# Altium PCB NBP8 Xilinx Virtex-II Pro BGA456 Rev1.01.PcbDoc (part 1 of 4)
Units mm, origin at the board's own origin, x right, y up, seen from the top; angles counter-clockwise.
Board outline 69 x 99.5 mm, 8 copper layers (Top Layer, InternalPlane1, InternalPlane2, MidLayer1, MidLayer2, MidLayer3, MidLayer4, Bottom Layer), stack 1.545 mm thick; 164 components, 314 nets, 1132 pads, 807 vias.
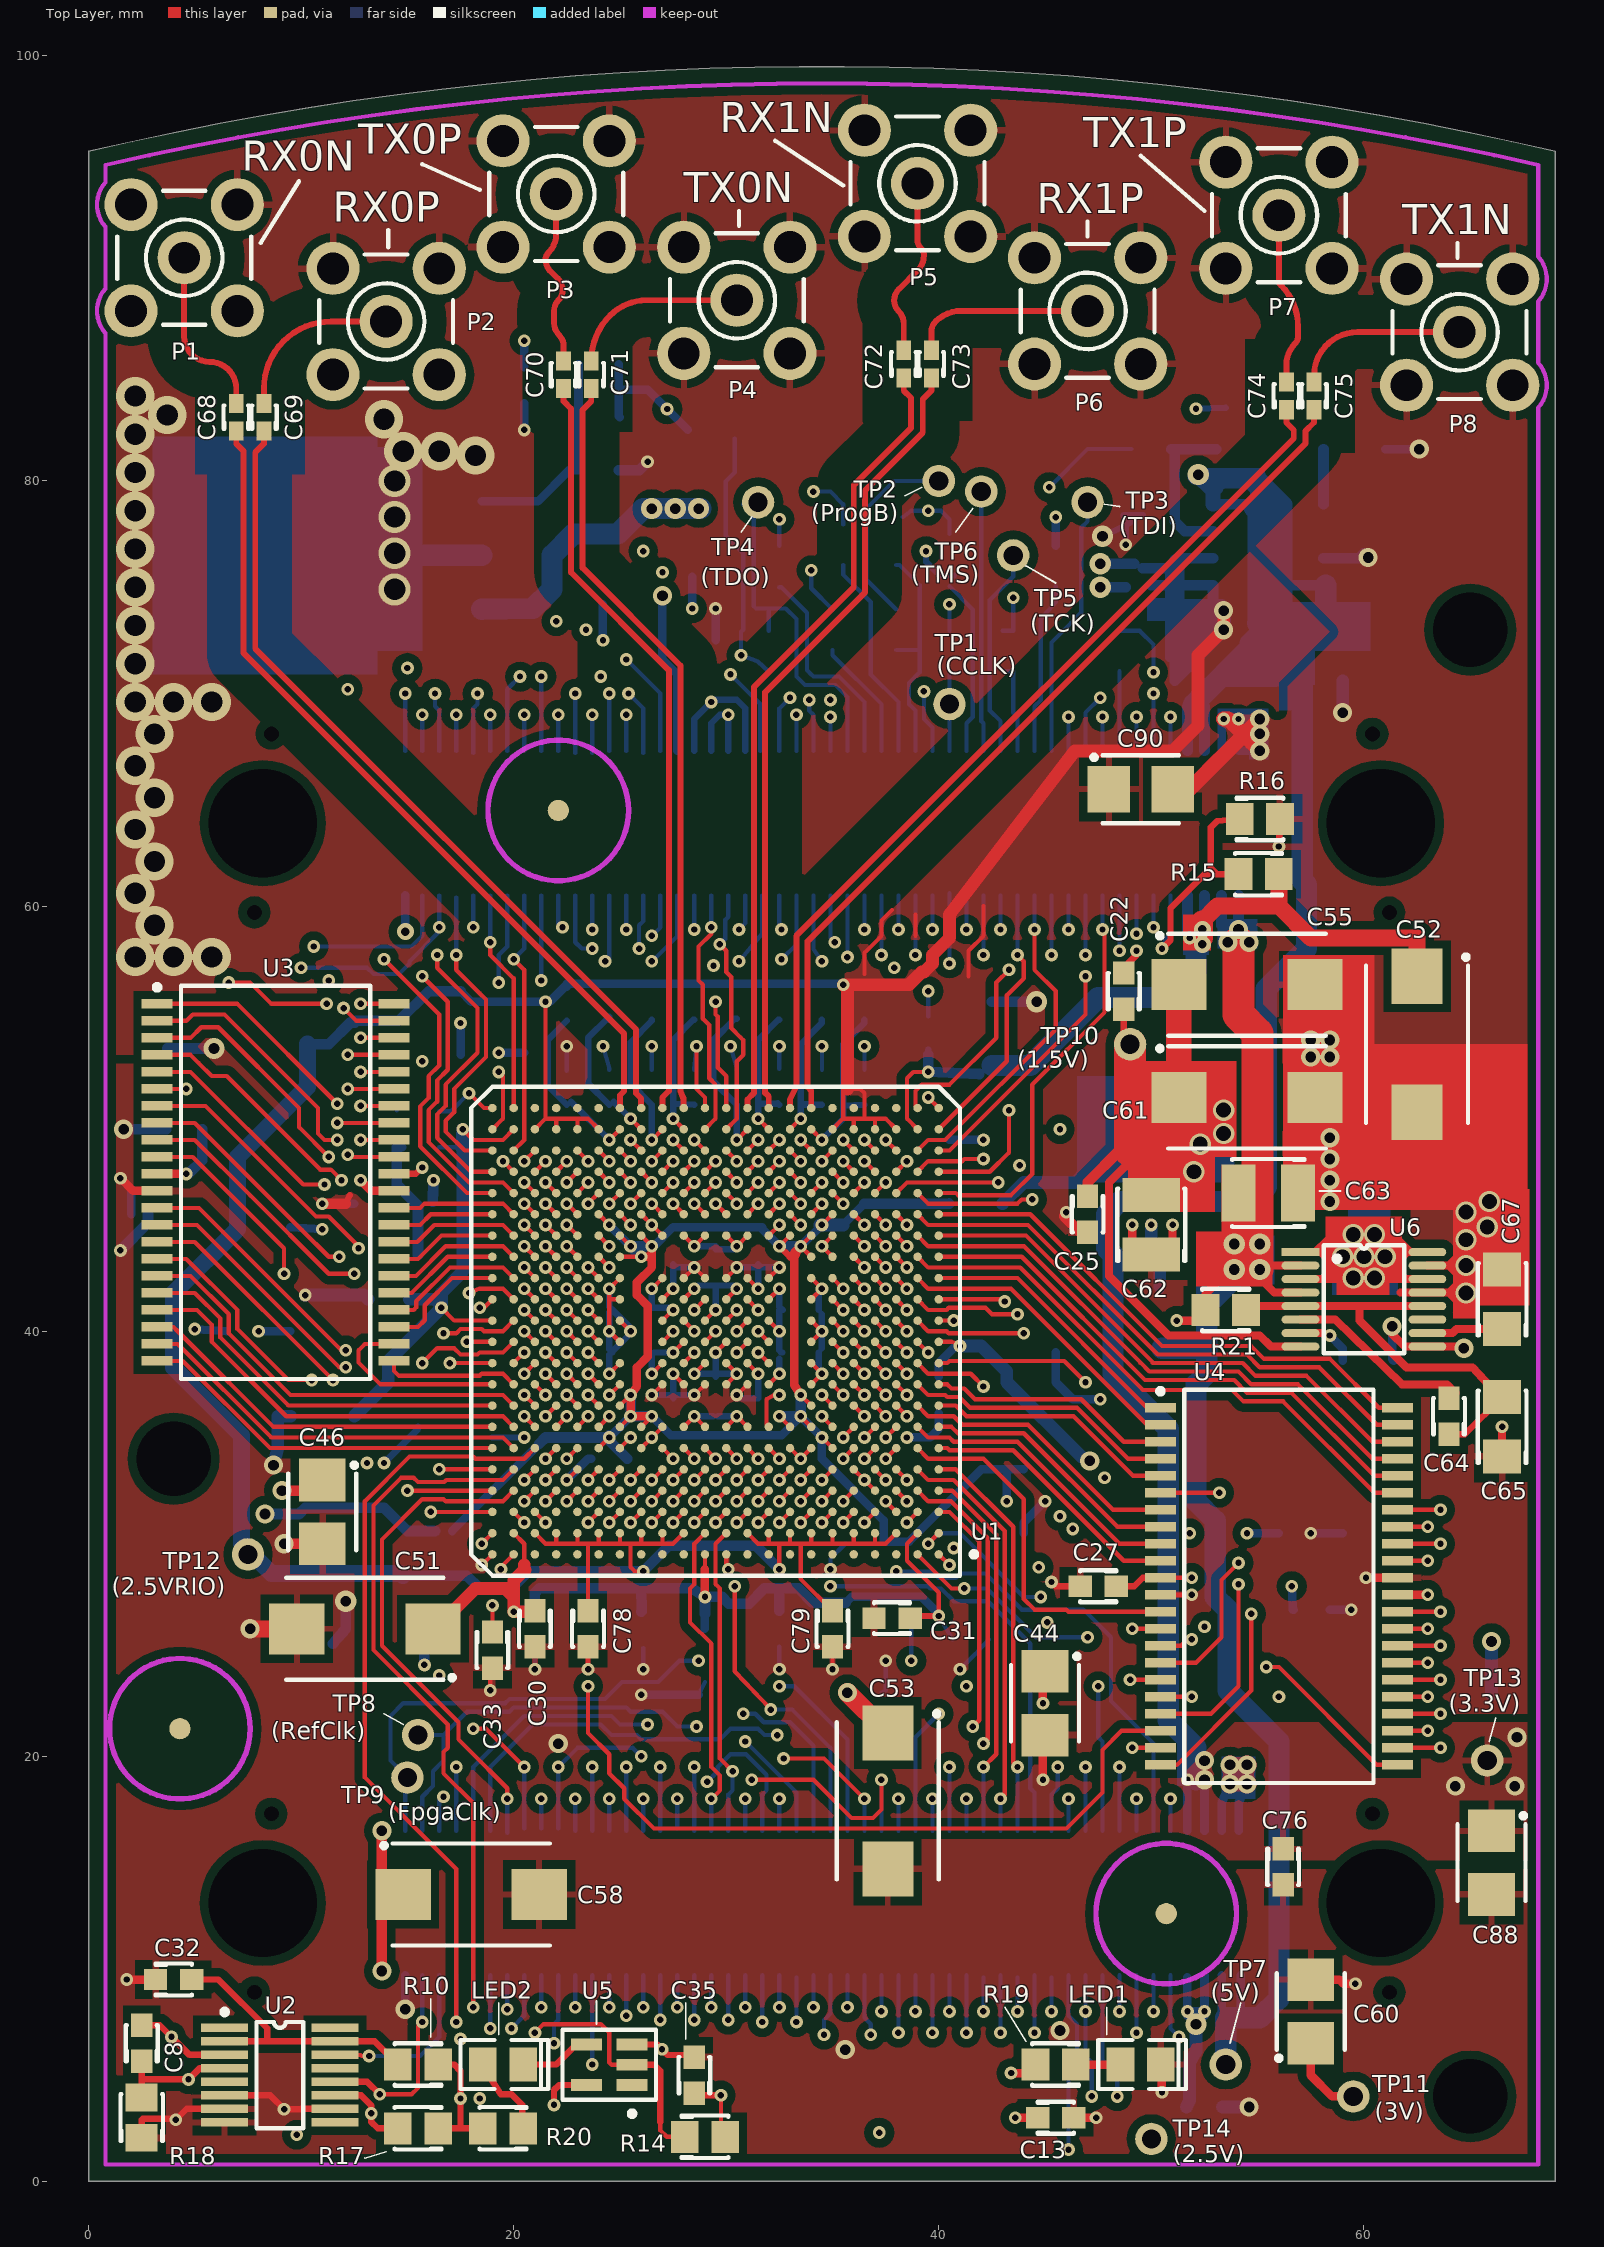
[diagram p0: Top Layer view]
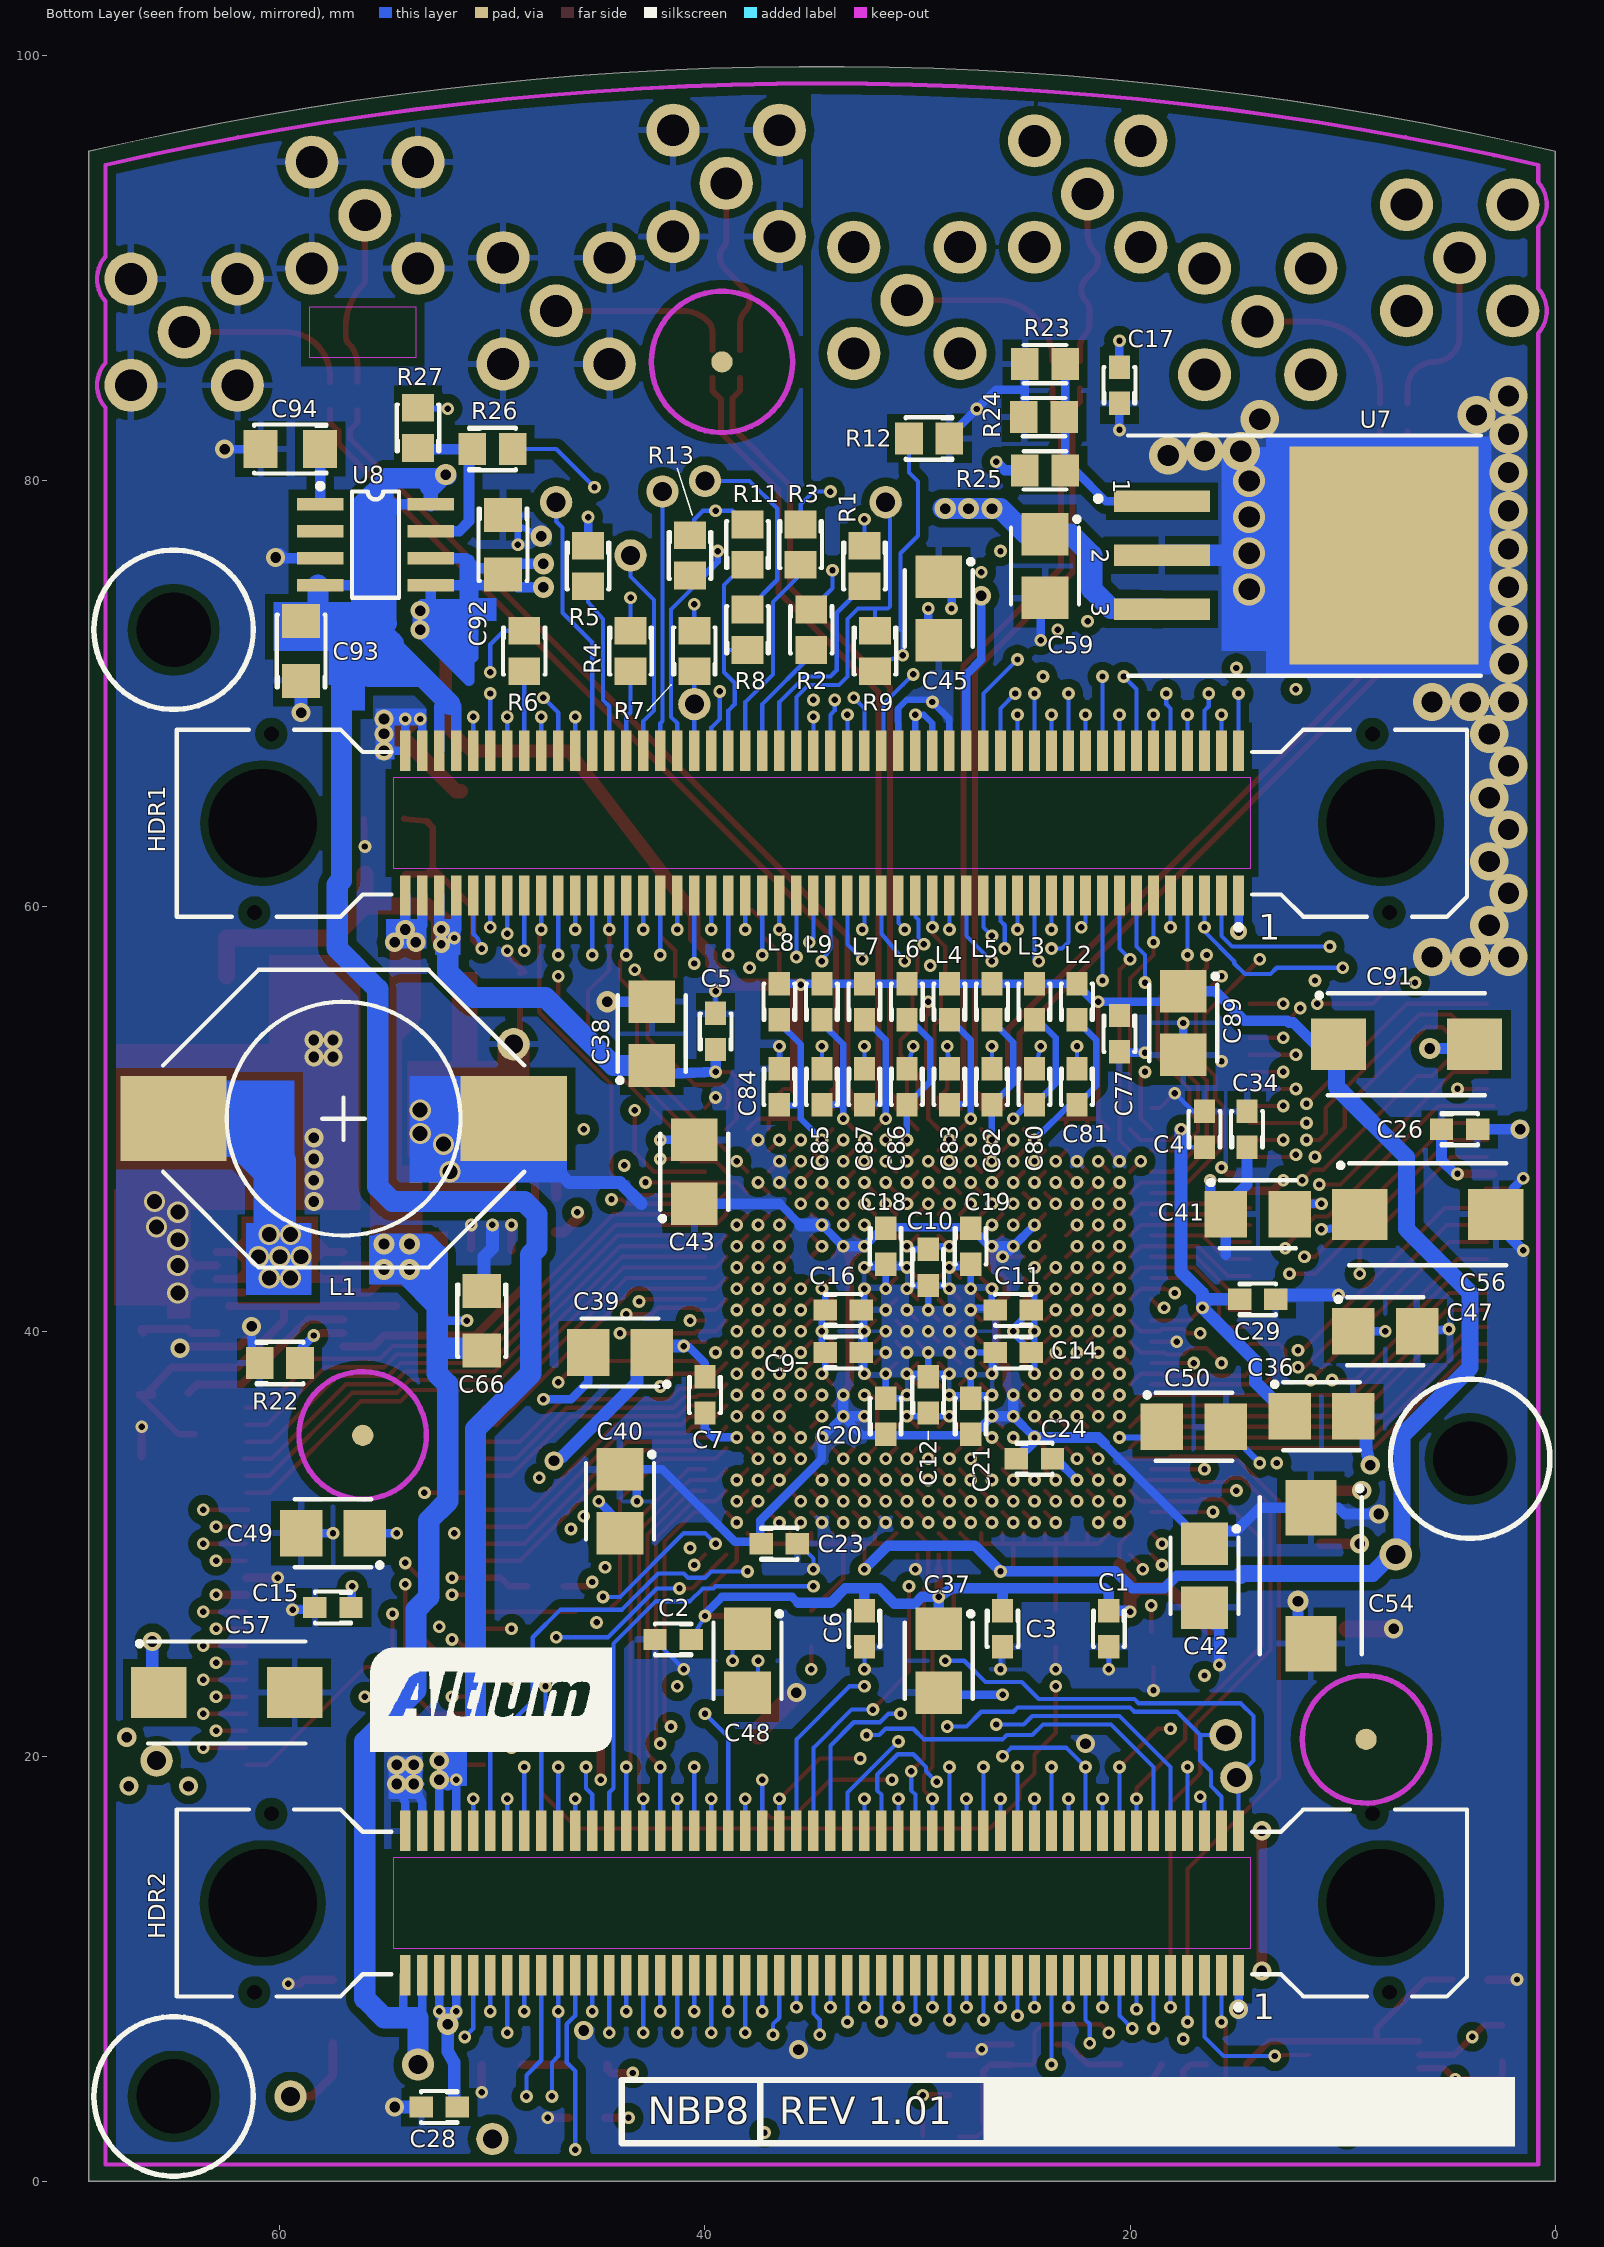
[diagram p1: Bottom Layer view, seen from below]
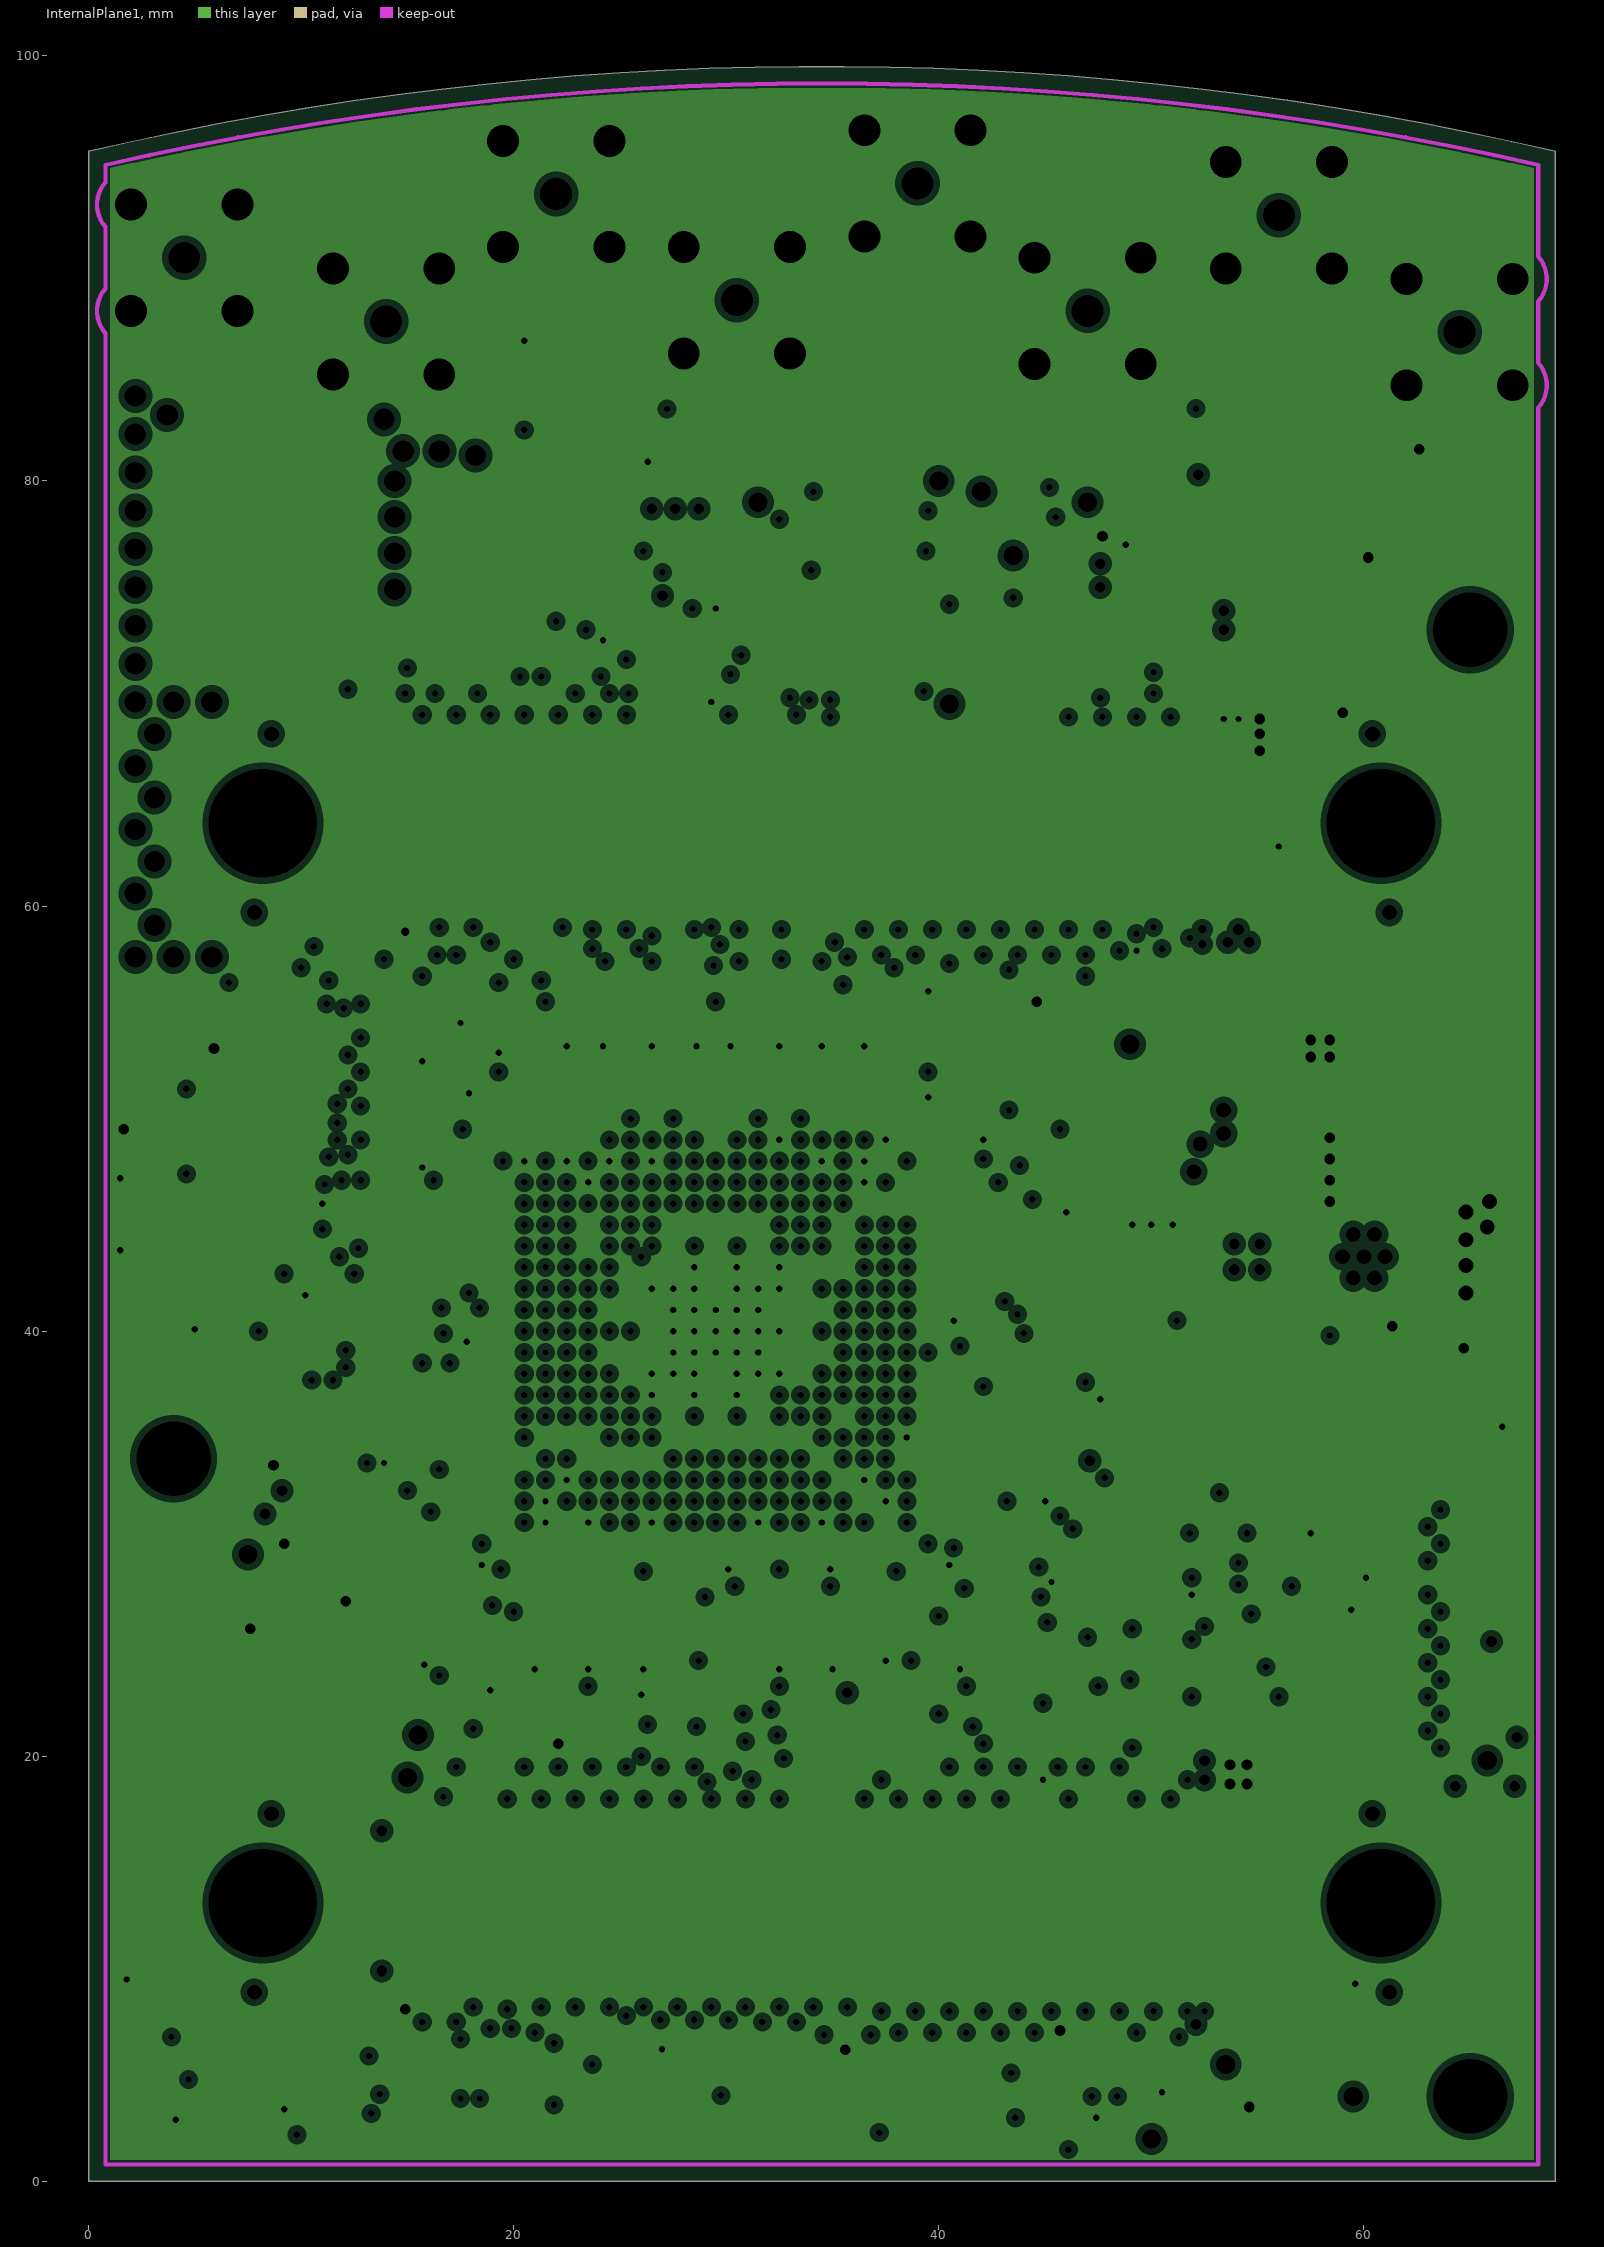
[diagram p2: InternalPlane1, clearances drawn from the general rule]
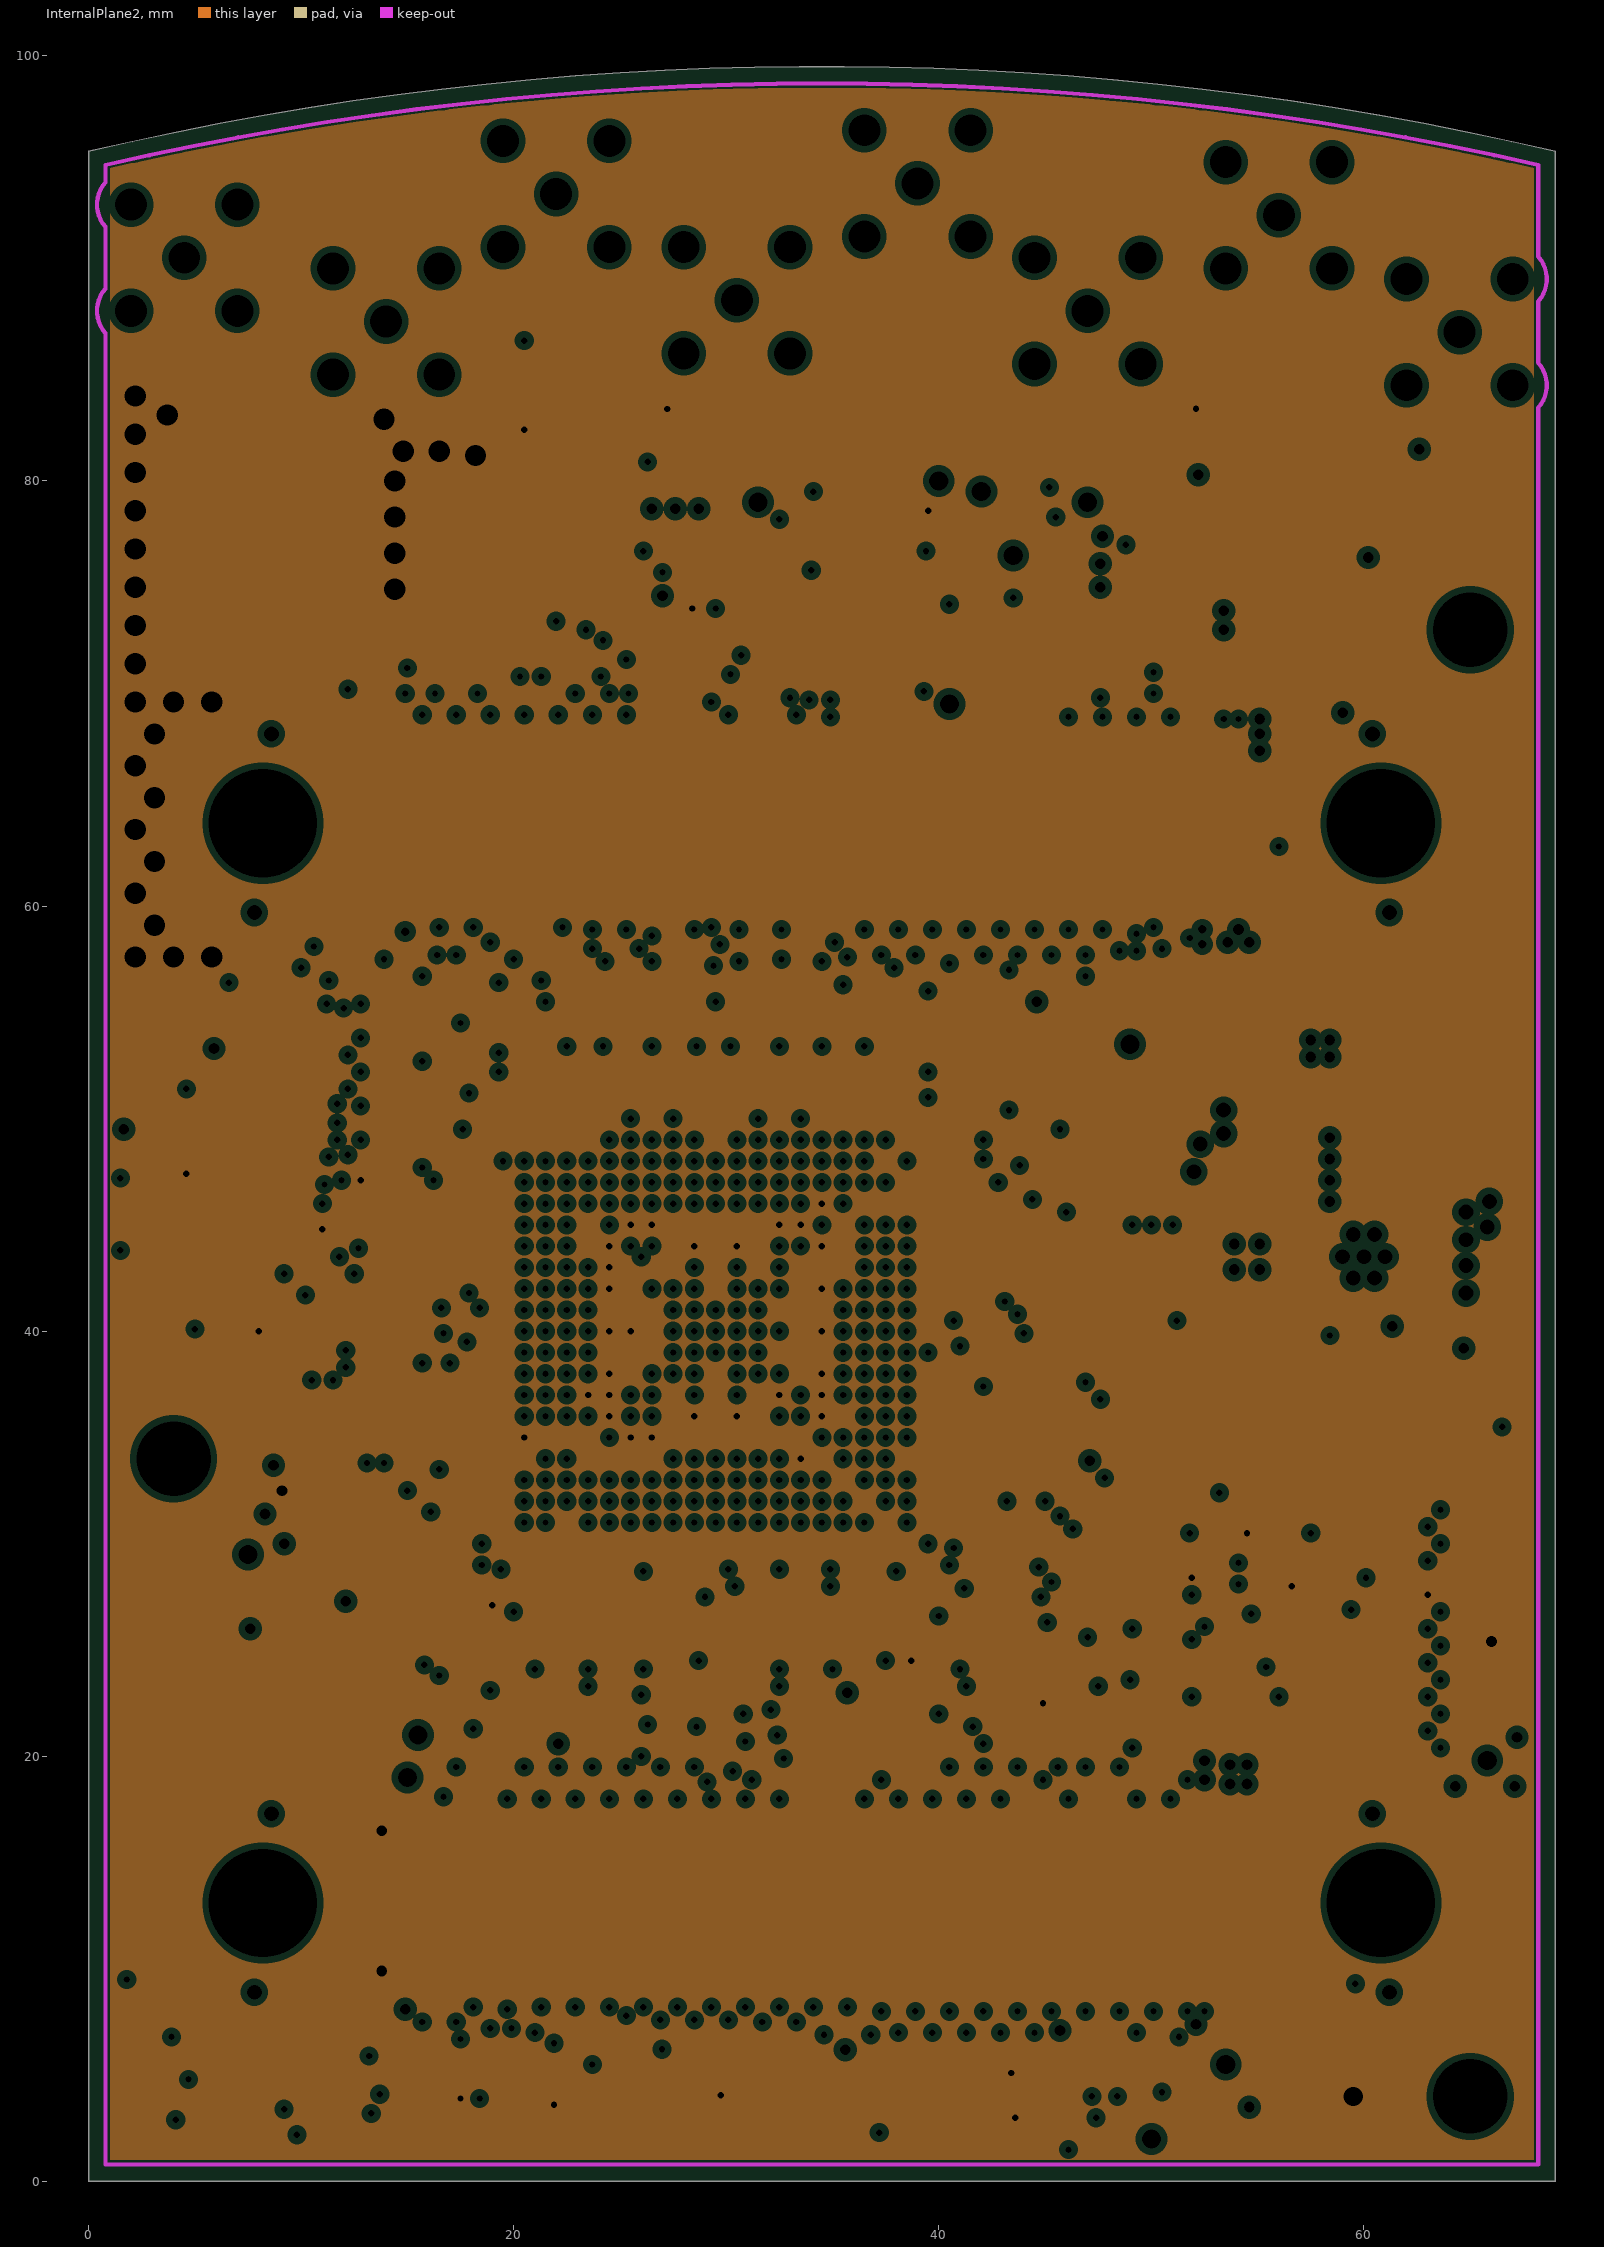
[diagram p3: InternalPlane2, clearances drawn from the general rule]
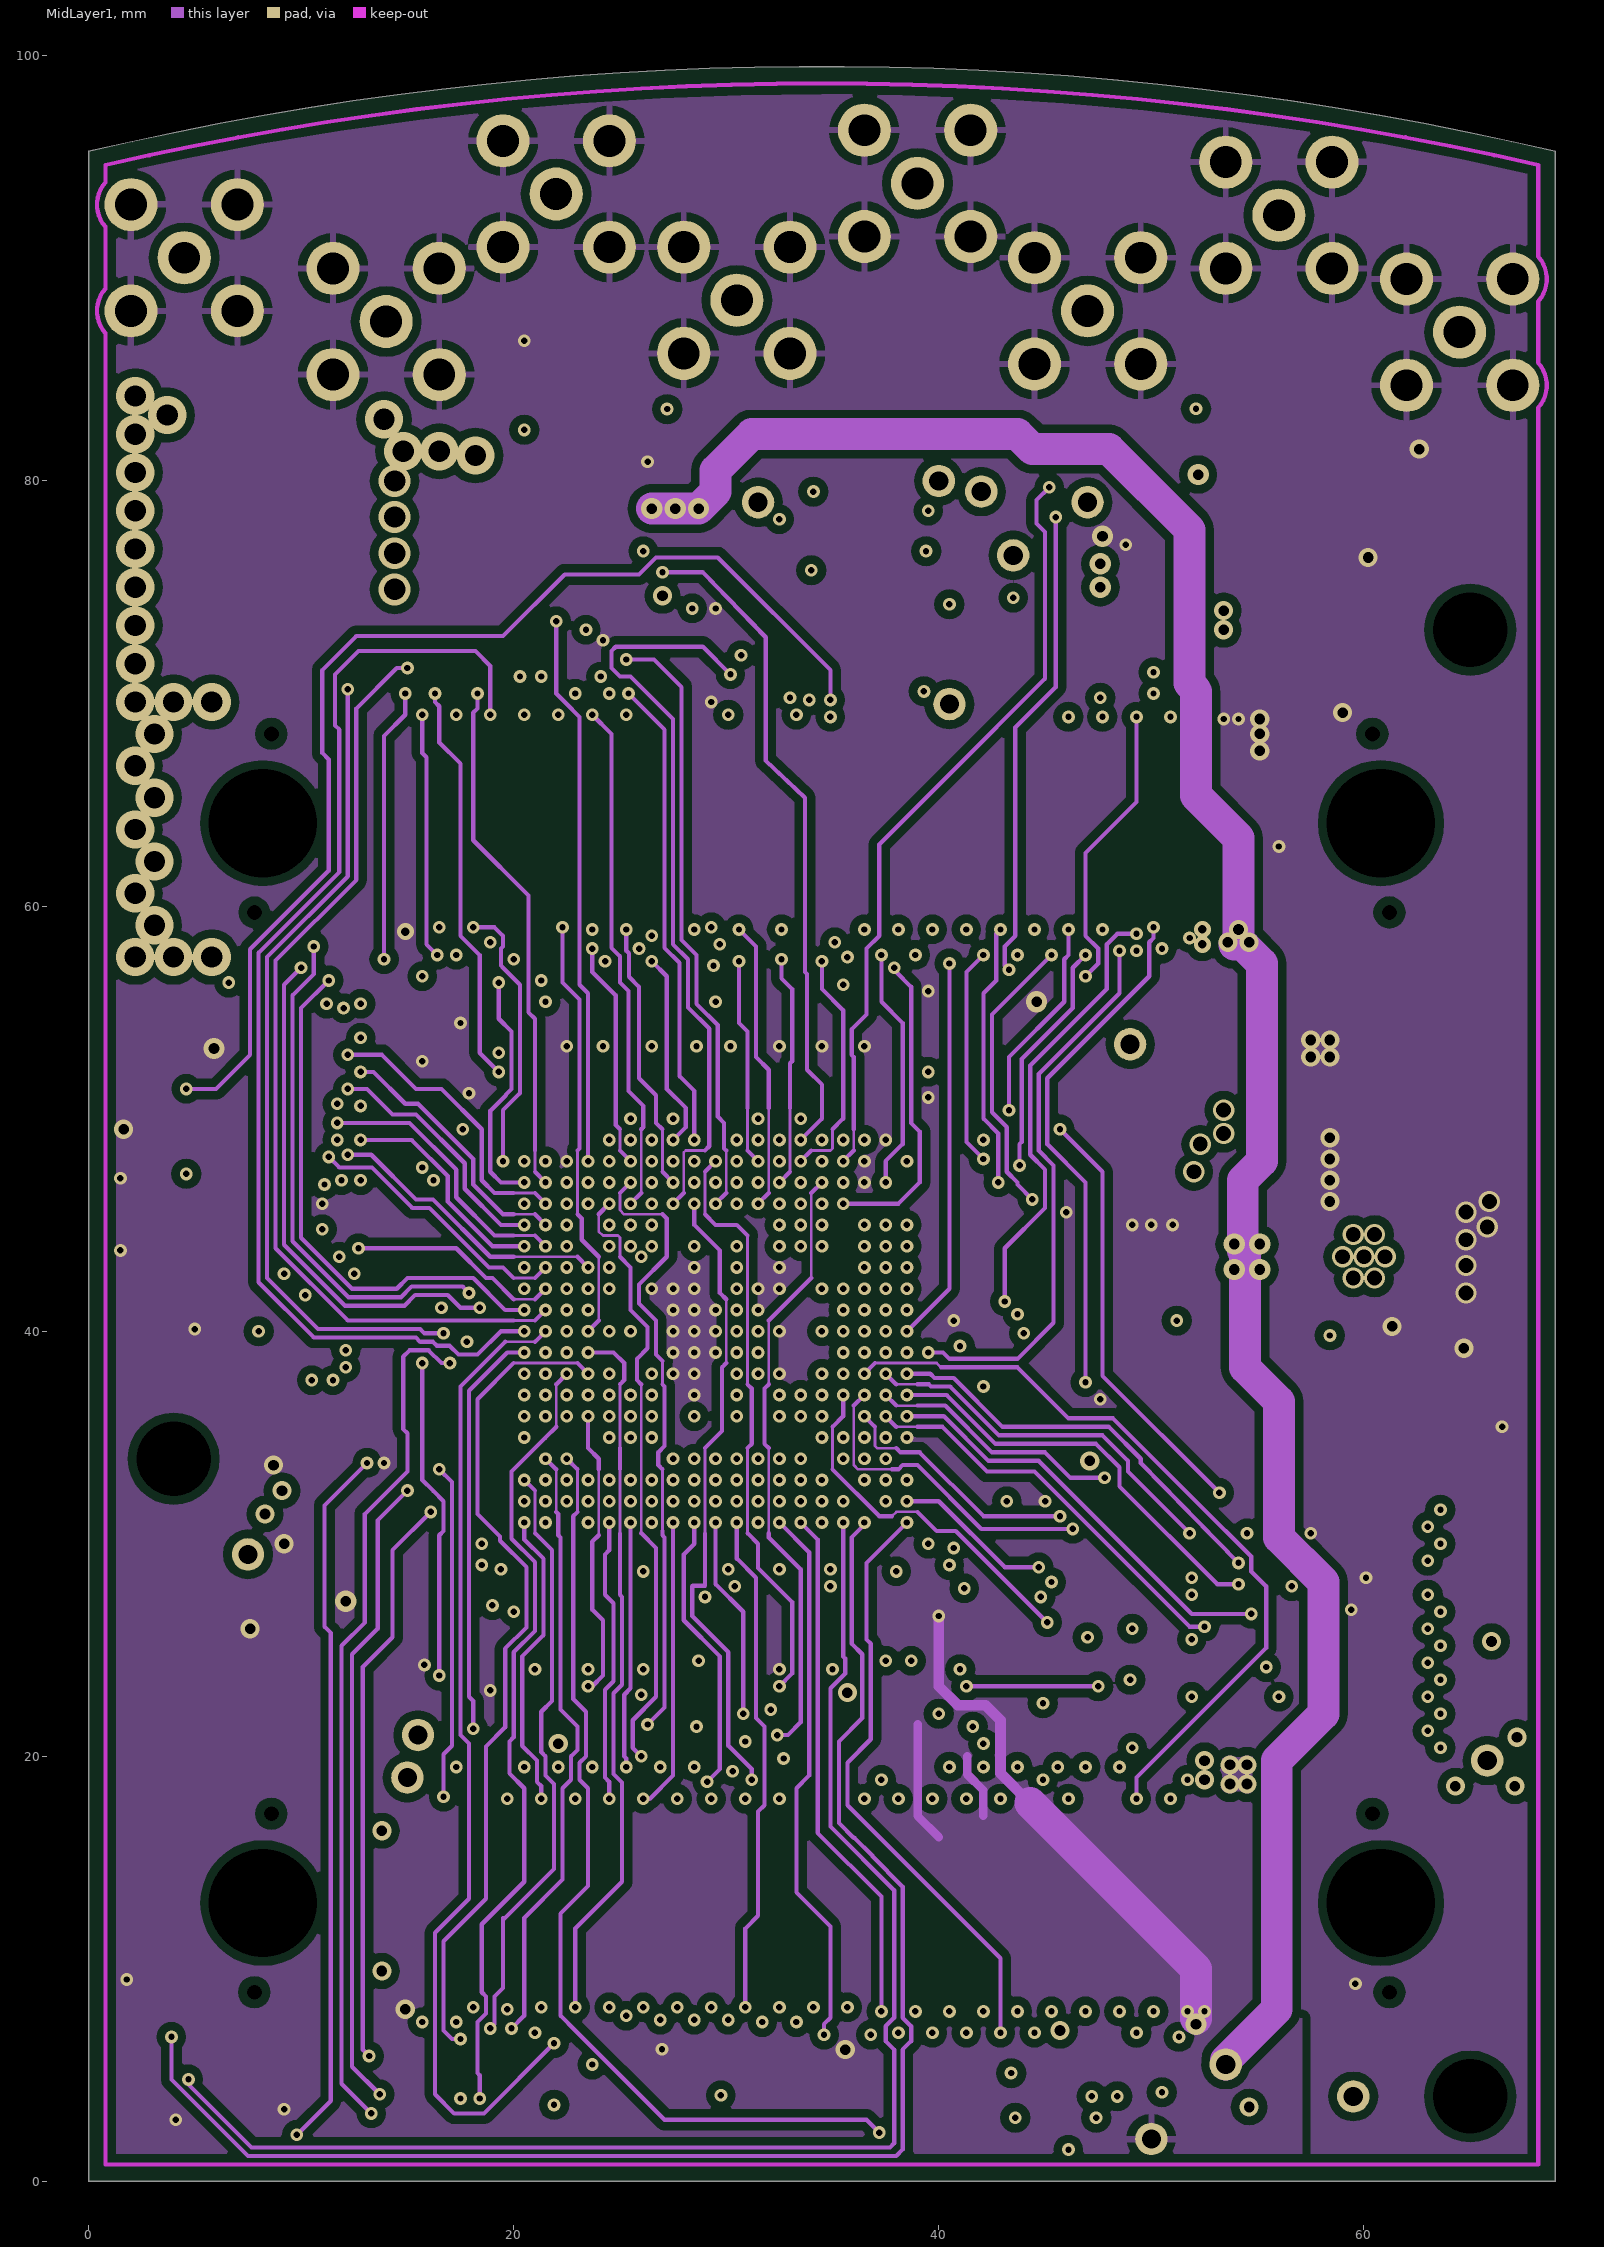
[diagram p4: MidLayer1]
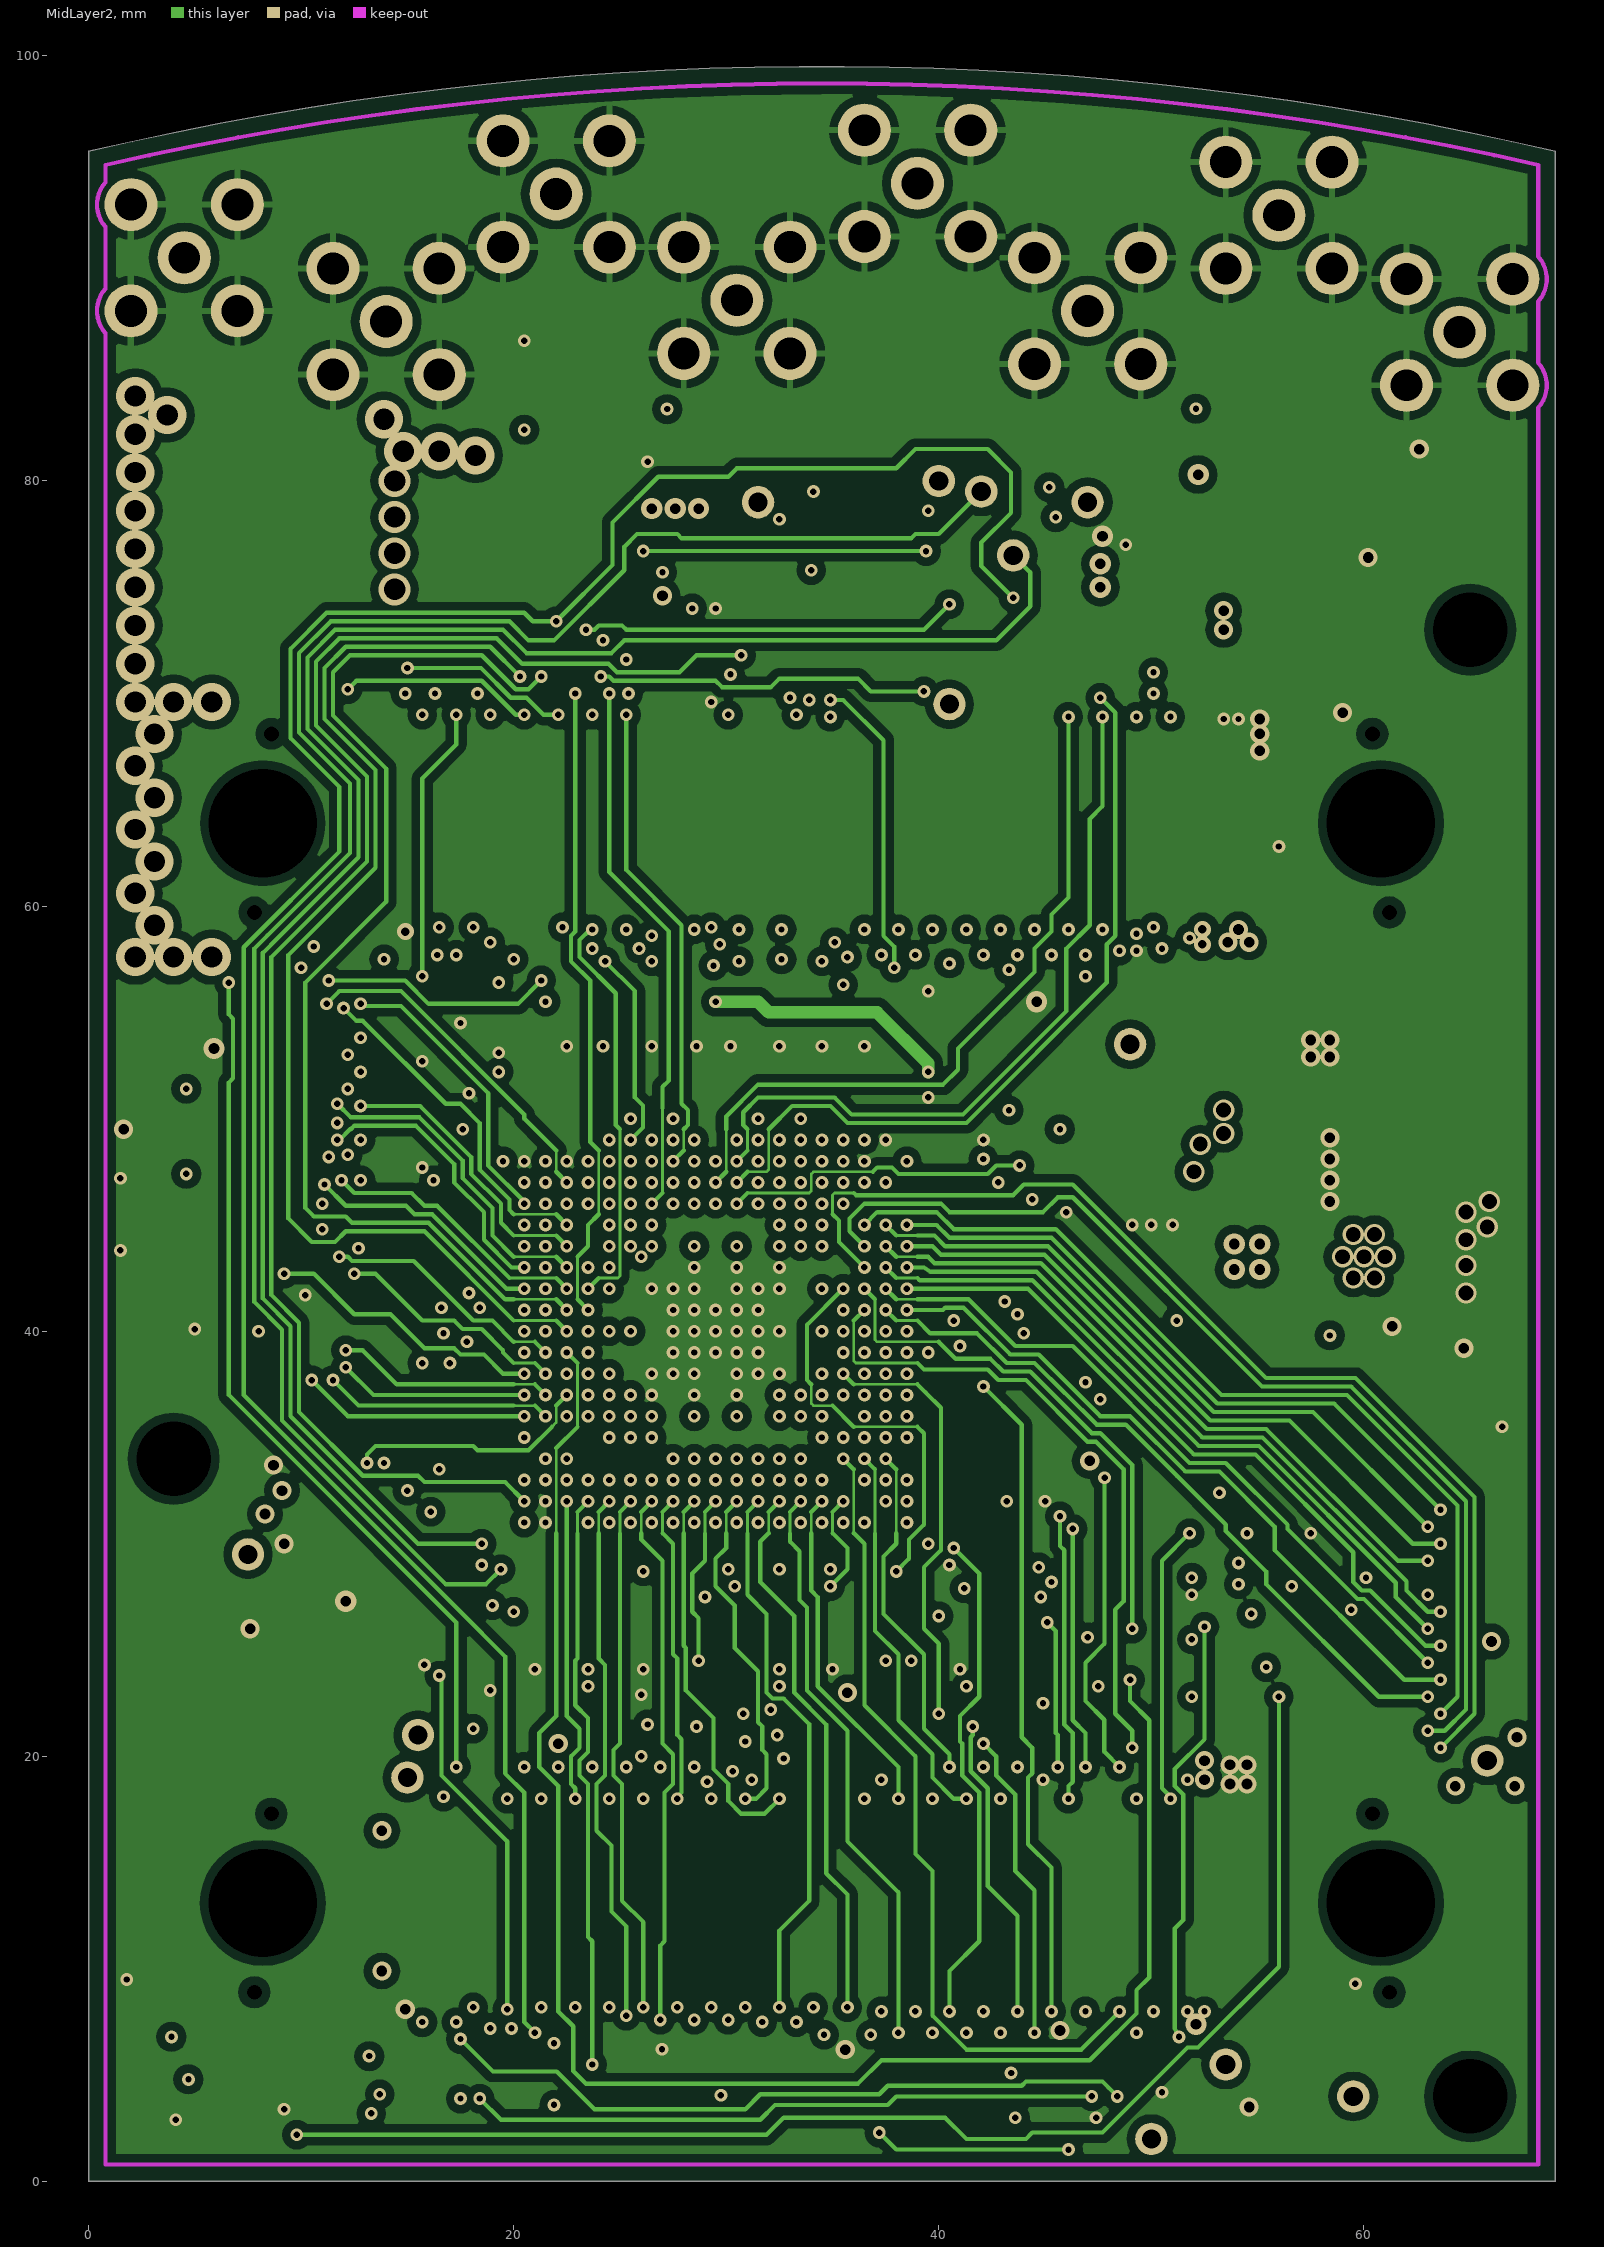
[diagram p5: MidLayer2]
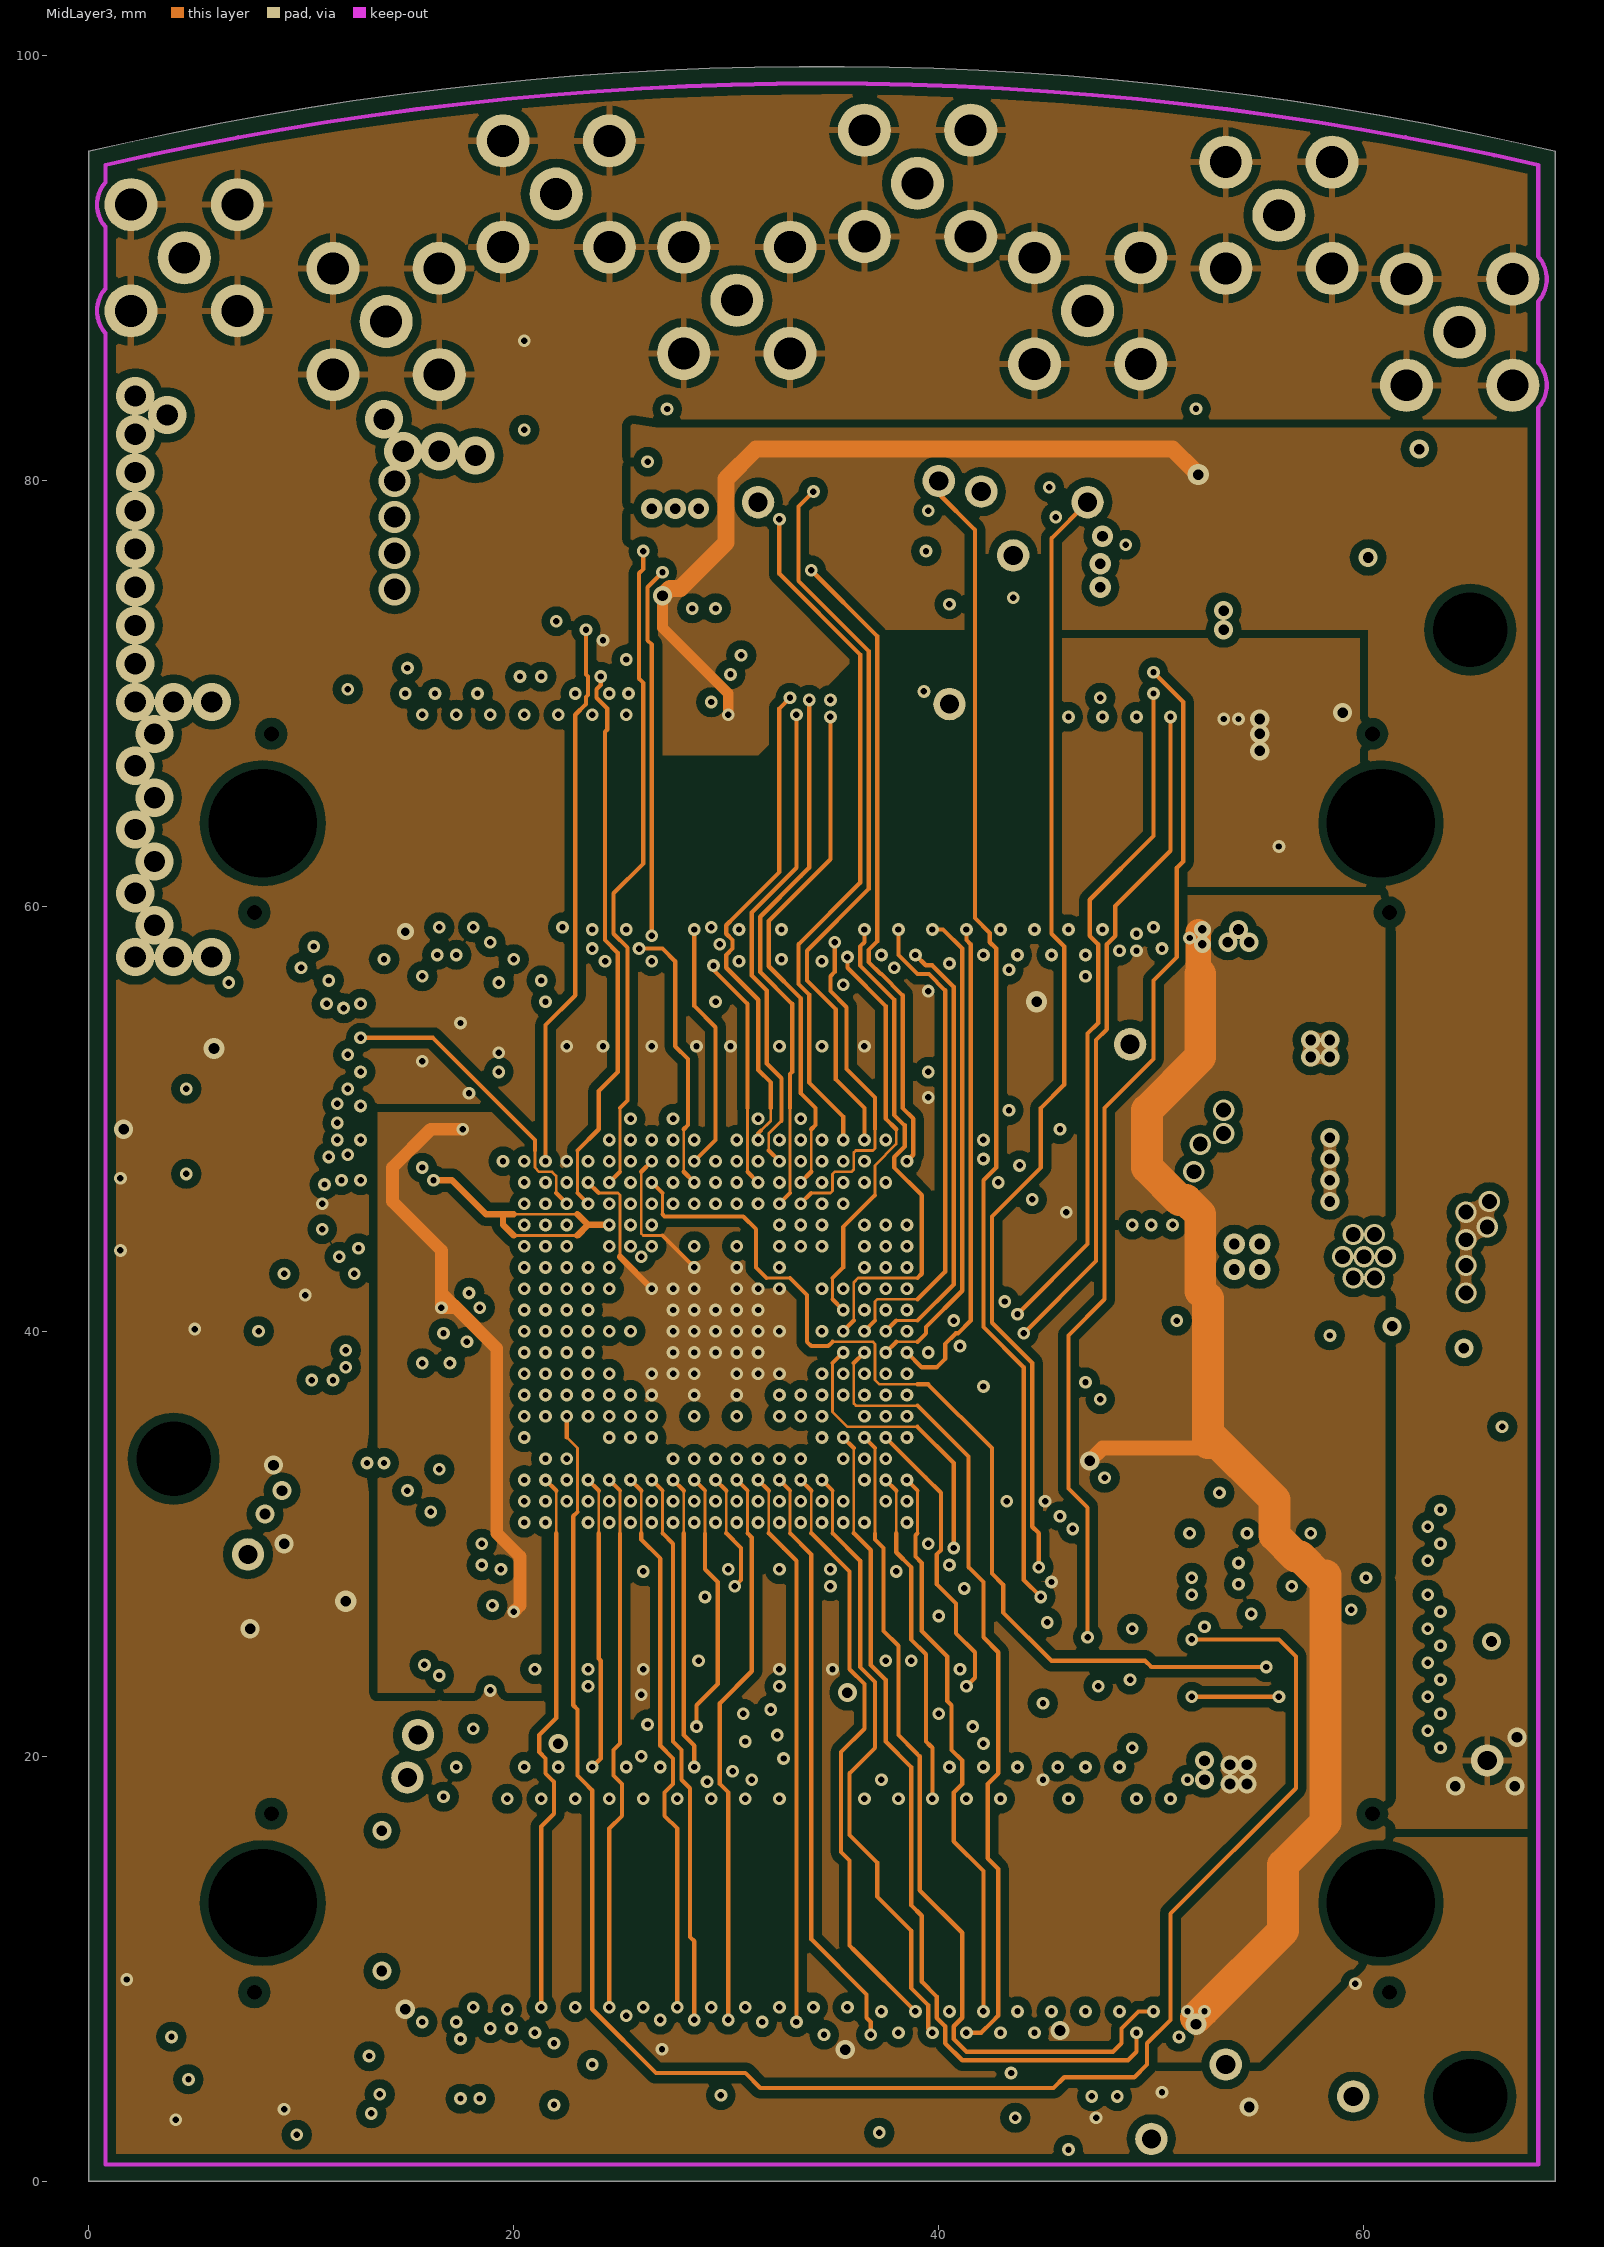
[diagram p6: MidLayer3]
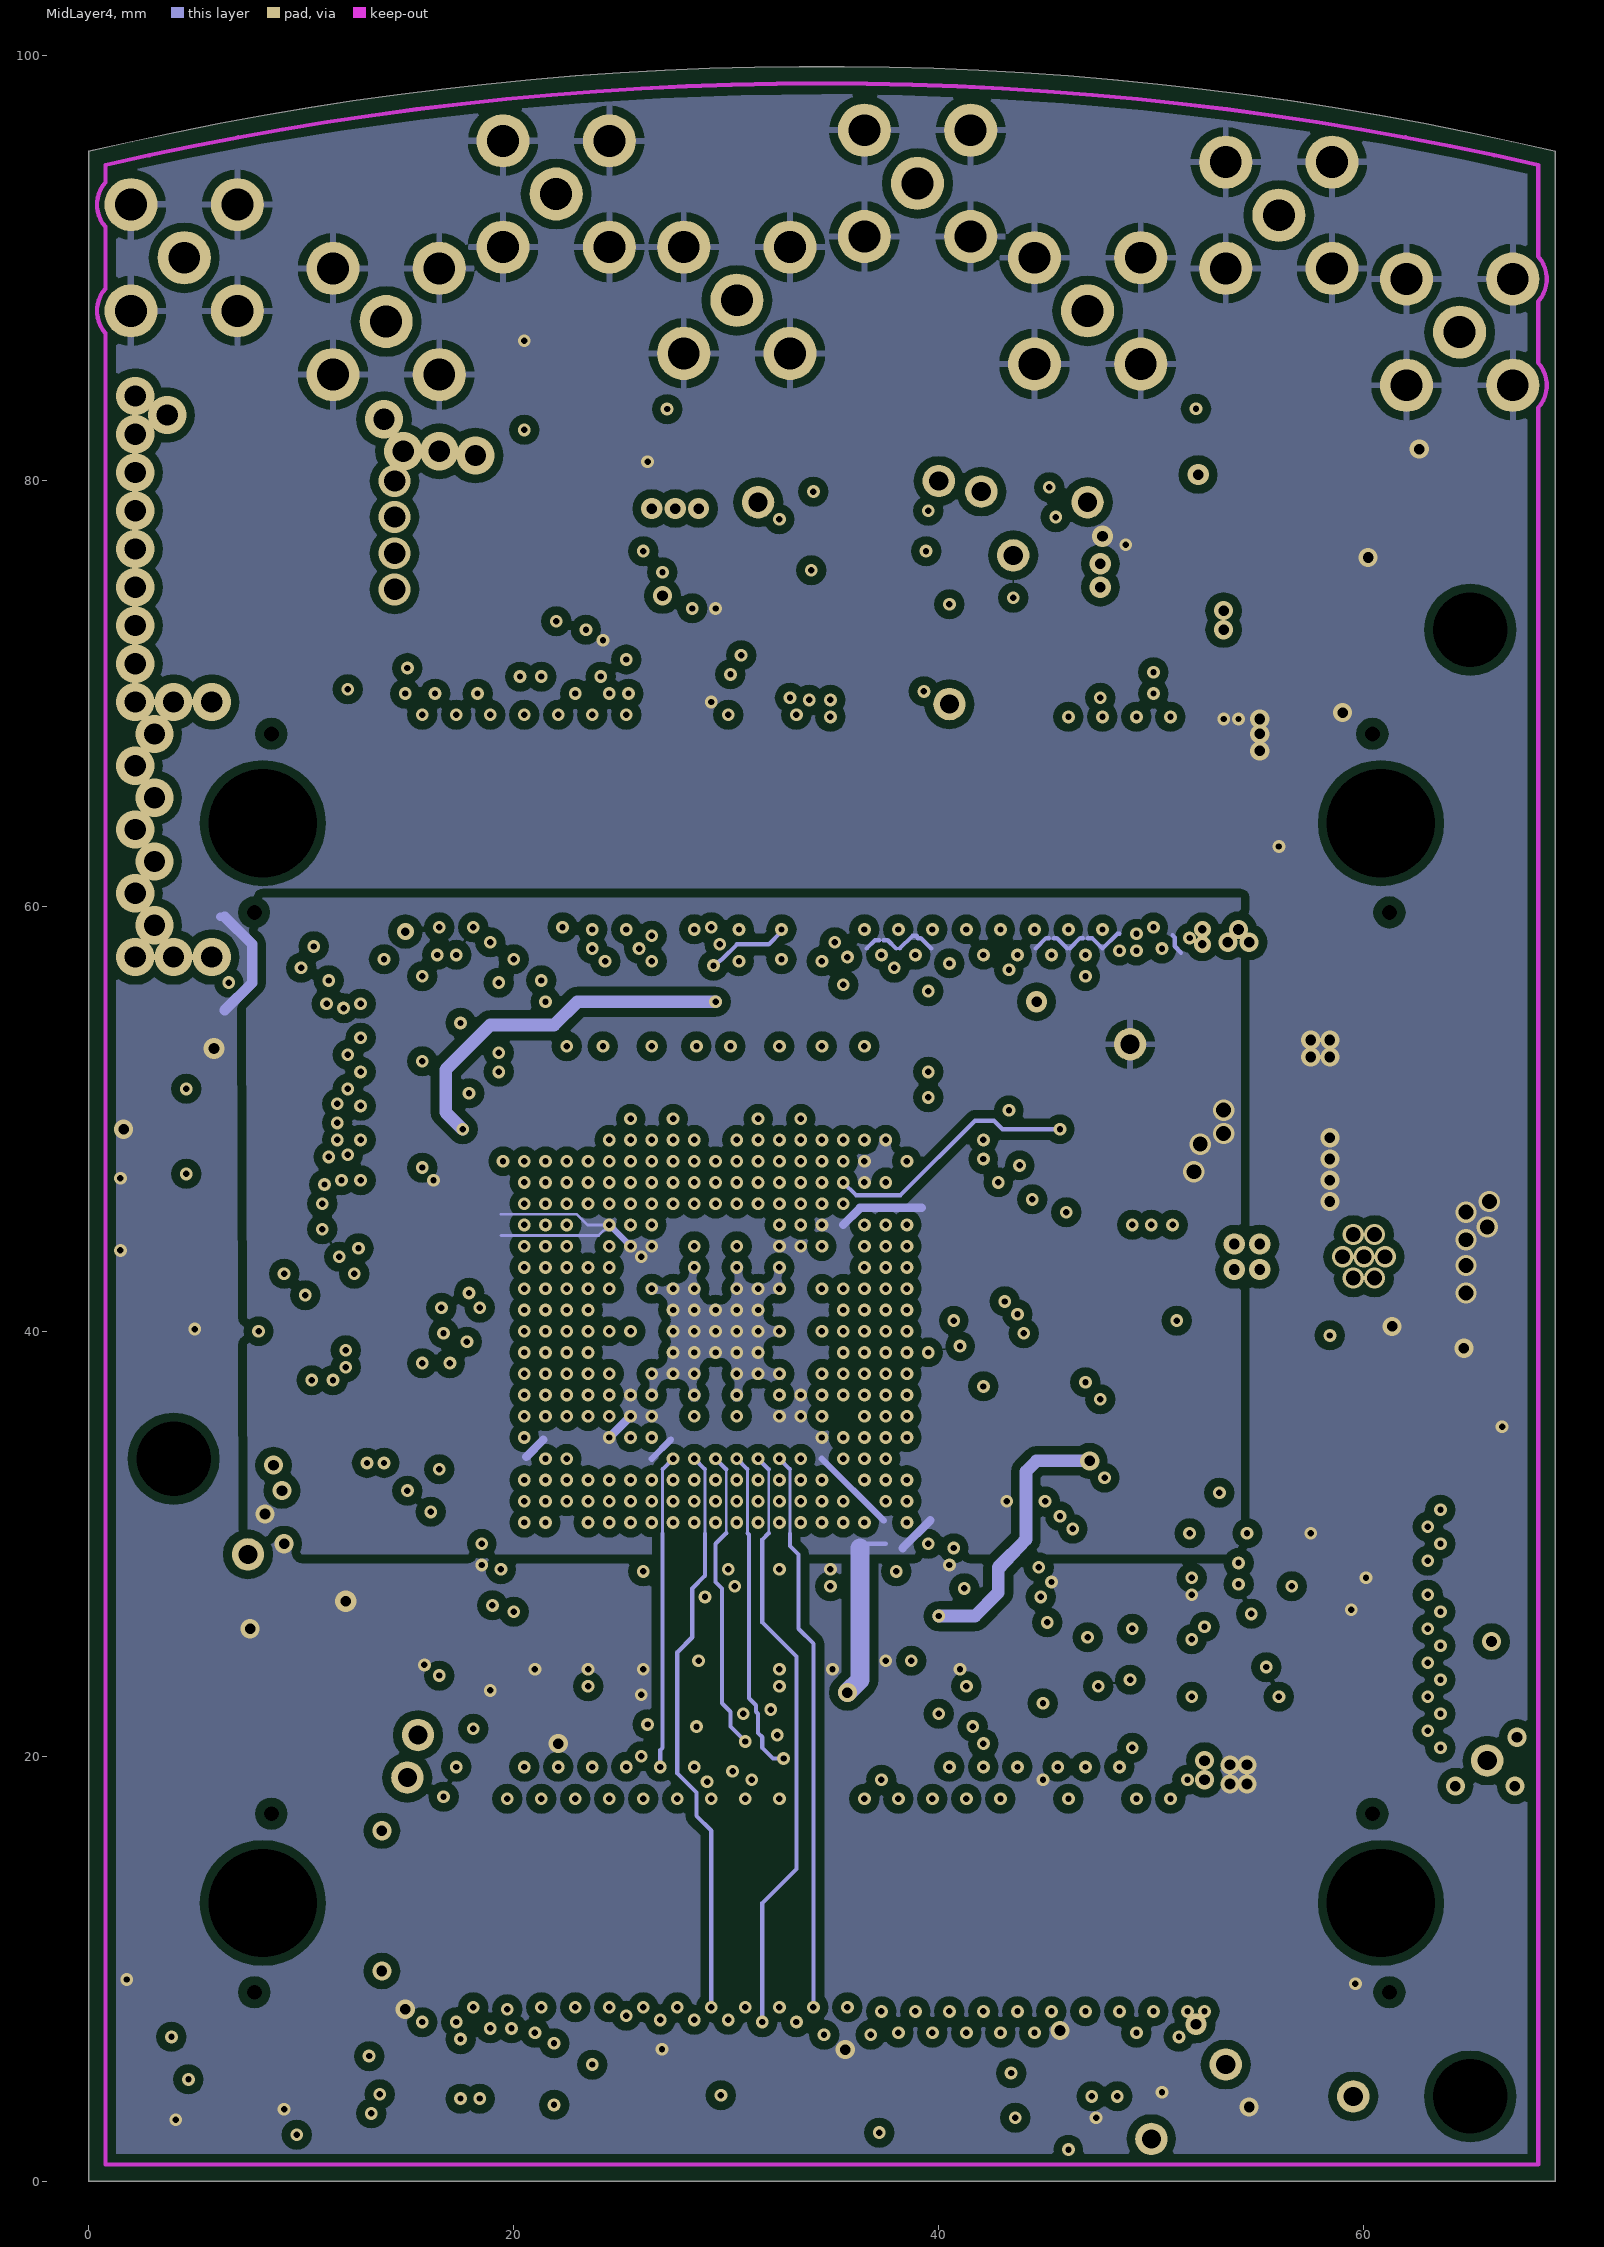
[diagram p7: MidLayer4]

## Layer stack, top to bottom
Top Layer: signal copper 0.018
Dielectric: core 0.2159, FR-4, Dk 4.5
InternalPlane1: plane copper 0.0356, net GND
Dielectric: prepreg 0.1524, FR-4, Dk 4.5
InternalPlane2: plane copper 0.0356, net VCC
Dielectric: core 0.2032, FR-4, Dk 4.5
MidLayer1: signal copper 0.0356
Dielectric: prepreg 0.1524, FR-4, Dk 4.5
MidLayer2: signal copper 0.0356
Dielectric: core 0.2032, FR-4, Dk 4.5
MidLayer3: signal copper 0.0356
Dielectric: prepreg 0.1524, FR-4, Dk 4.5
MidLayer4: signal copper 0.0356
Dielectric: core 0.2159, FR-4, Dk 4.5
Bottom Layer: signal copper 0.018

## Board outline
0,-0.001 cw(c0,0) -0.001,0 0,95.499 0,95.5 cw(c0.001,95.5) 0,95.501 cw(c34.5,-51.301) 69,95.501 cw(c68.999,95.5) 69,95.5 69,95.499 69.001,0 cw(c69,0) 69,-0.001

## Design rules (kind name [scope] priority, off if disabled: settings)
Clearance "Rocket I/O -> Top Layer Plane Clearance" [InNetClass('ROCKET_IO_LINES') vs OnLayer('Top Layer') And InPolygon] p1: gap=1.6
Clearance "Polygon Clearance" [InPoly] p2: gap=0.4
Clearance "TX1 Clearance" [InNetClass('TX1') vs InNetClass('TX1')] p3: gap=0.254
Clearance "RX1 Clearance" [InNetClass('RX1') vs InNetClass('RX1')] p4: gap=0.254
Clearance "RX0 Clearance" [InNetClass('RX0') vs InNetClass('RX0')] p5: gap=0.254
Clearance "TX0 Clearance" [InNetClass('TX0') vs InNetClass('TX0')] p6: gap=0.254
Clearance "Via --> Mid Layer Clearance" [IsVia vs OnMid] p7: gap=0.127
Clearance "Pad to Via Clearance" [IsPad vs IsVia] p8: gap=0.2
Clearance "General Clearance" [All] p9: gap=0.2
ComponentClearance ComponentClearance_General [Not InComponentClass('Rocket Decoupling Caps') vs Not InComponentClass('Rocket Decoupling Caps')] p1: gap=0.2 collisioncheckmode=3 verticalgap=0.254 showdistances=FALSE
ComponentClearance ComponentClearance_Default [All] p2 off: gap=0.2 collisioncheckmode=3 verticalgap=0.254 showdistances=FALSE
DiffPairsRouting [All] p1: maxlimit=0.254 minlimit=0.254 mostfreqgap=0.254 maxuncoupledlength=12.7
FabricationTestPointUsage TestPointUsage [All] p1 off: valid=0 allowmultiple=FALSE
FabricationTestpoint Testpoint [All] p1 off: side=3 testpointundercomponent=TRUE minsize=1.016 maxsize=2.54 preferedsize=1.524 minholesize=0 maxholesize=1.016 preferedholesize=0.813 testpointgrid=0.025 allowsidetop=TRUE allowsidebottom=TRUE usegrid=TRUE gridtolerance=0
FanoutControl Fanout_Small [CompPinCount < 5] p4: bgadir=Out bgaviamode=Centered fanoutstyle=Auto fanoutdirection=OutThenIn viagrid=0.025 // Fanout_Small (Default Rule)
HoleSize [All] p1: absolutevalues=TRUE maxlimit=10 minlimit=0.3 maxpercent=80.000 minpercent=20.000
MatchedLengths "V_RX0PN MatchedLengths" [InNet('V_RX0N') Or  InNet('V_RX0P')] p1 off: tolerance=0.1 checknetsindiffpair=TRUE checkdiffpairvsdiffpair=TRUE checkothers=TRUE
MatchedLengths "RX0PN MatchedLengths" [InNet('RX0P') Or InNet('RX0N')] p2 off: tolerance=0.1 checknetsindiffpair=TRUE checkdiffpairvsdiffpair=TRUE checkothers=TRUE
PlaneClearance [All] p1: clearance=0.3
PlaneConnect PlaneConnect_Vias [IsVia] p1: planeconnectstyle=Direct reliefexpansion=0.5 reliefentries=4 reliefconductorwidth=0.25 reliefairgap=0.25
PlaneConnect [All] p2: planeconnectstyle=Relief reliefexpansion=0.5 reliefentries=4 reliefconductorwidth=0.25 reliefairgap=0.25
PolygonConnect [All] p1: connectstyle=Relief reliefconductorwidth=0.3 reliefentries=4 polygonreliefangle="90 Angle"
RoutingLayers [All] p1: top layer_v5=TRUE mid layer 1_v5=TRUE mid layer 2_v5=TRUE mid layer 3_v5=FALSE mid layer 4_v5=FALSE bottom layer_v5=TRUE
RoutingVias [All] p1: holewidth=0.3 width=0.6 viastyle="Through Hole" minholewidth=0.3 minwidth=0.5 maxholewidth=0.5 maxwidth=1
SMDNeckDown [All] p1: percent=100.000
SilkscreenOverComponentPads [All] p1: minsilkscreentomaskgap=0.254
SolderMaskExpansion [All] p1: expansion=0.15
Width "Rocket IO Width" [InNetClass('ROCKET_IO_LINES')] p1: maxlimit=0.279 minlimit=0.279 preferedwidth=0.279
Width [All] p2: maxlimit=5 minlimit=0.127 preferedwidth=0.2 toplayer_minwidth=0.2 midlayer4_prefwidth=0.127 bottomlayer_minwidth=0.2
18 further rules are at their usual default settings.

## Classes and differential pairs
component class "NBP8 Xilinx Virtex-II Pro BGA456 Rev1.01": C1 C2 C3 C4 C5 C6 C7 C8 C9 C10 C11 C12 C13 C14 C15 C16 C17 C18 C19 C20 C21 C22 C23 C24 C25 C26 C27 C28 C29 C30 C31 C32 C33 C34 C35 C36 C37 C38 C39 C40 C41 C42 C43 C44 C45 C46 C47 C48 C49 C50 C51 C52 C53 C54 C55 C56 C57 C58 HDR1 HDR2 LED1 LED2 R1 R2 R3 R4 R5 R6 R7 R8 R9 R10 R11 R12 R13 R14 R15 R16 R17 R18 R19 R20 TP1 TP2 TP3 TP4 TP5 TP6 TP7 TP8 TP9 TP10 TP11 TP13 TP14 U1 U2 U3 U4 U5
component class "Rocket Decoupling Caps": C68 C69 C70 C71 C72 C73 C74 C75
component class "Bottom Side": C1 C2 C3 C4 C5 C6 C7 C9 C10 C11 C12 C14 C15 C16 C17 C18 C19 C20 C21 C23 C24 C26 C28 C29 C34 C36 C37 C38 C39 C40 C41 C42 C43 C45 C47 C48 C49 C50 C54 C56 C57 C59 C66 C77 C80 C81 C82 C83 C84 C85 C86 C87 C89 C91 C92 C93 C94 HDR1 HDR2 L1 L2 L3 L4 L5 L6 L7 L8 L9 R1 R2 R3 R4 R5 R6 R7 R8 R9 R11 R12 R13 R22 R23 R24 R25 R26 R27 U7 U8
component class "Top Side": C8 C13 C22 C25 C27 C30 C31 C32 C33 C35 C44 C46 C51 C52 C53 C55 C58 C60 C61 C62 C63 C64 C65 C67 C68 C69 C70 C71 C72 C73 C74 C75 C76 C78 C79 C88 C90 LED1 LED2 P1 P2 P3 P4 P5 P6 P7 P8 R10 R14 R15 R16 R17 R18 R19 R20 R21 TP1 TP2 TP3 TP4 TP5 TP6 TP7 TP8 TP9 TP10 TP11 TP12 TP13 TP14 U1 U2 U3 U4 U5 U6
component class RIO_CONNECTORS: P1 P2 P3 P4 P5 P6 P7 P8
net class ROCKET_IO_LINES: RX0N RX0P RX1N RX1P TX0N TX0P TX1N TX1P V_RX0N V_RX0P V_RX1N V_RX1P V_TX0N V_TX0P V_TX1N V_TX1P
net class RX1: RX1N RX1P V_RX1N V_RX1P
net class TX1: TX1N TX1P V_TX1N V_TX1P
net class RX0: RX0N RX0P V_RX0N V_RX0P
net class TX0: TX0N TX0P V_TX0N V_TX0P
component class "PSU 1": C59 C60 C61 C62 C63 C64 C65 C66 C67 L1 R21 R22 R23 R24 R25 U6 U7
pad class 500andUp: U1-A8 U1-A9 U1-A14 U1-A15 U1-AA8 U1-AA9 U1-AA14 U1-AA15 U1-AB8 U1-AB9 U1-AB14 U1-B8 U1-B9 U1-B14 U1-B15 U1-C9 U1-C14 U1-C15 U1-D9 U1-D14 U1-D15 U1-E9 U1-F9 U1-J1 U1-J2 U1-J3 U1-J4 U1-J5 U1-J19 U1-J20 U1-J21 U1-J22 U1-K5 U1-K6 U1-K17 U1-K18 U1-K19 U1-K20 U1-L6 U1-N3 U1-N4 U1-N5 U1-N6 U1-N18 U1-N19 U1-N20 U1-P1 U1-P2 U1-P3 U1-P4 U1-P18 U1-P19 U1-P20 U1-P21 U1-P22 U1-U14 U1-V14 U1-W8 U1-W9 U1-W14 U1-Y8 U1-Y9 U1-Y14
pad class IN_ONLY: U1-A11 U1-AA11 U1-AA12 U1-C11 U1-D11 U1-D12 U1-F12 U1-F13 U1-W11 U1-W12 U1-Y11 U1-Y12
pad class IO: U1-A4 U1-A5 U1-A6 U1-A10 U1-A13 U1-A17 U1-A18 U1-A19 U1-AA5 U1-AA10 U1-AA13 U1-AA17 U1-AA18 U1-AA20 U1-AB5 U1-AB13 U1-AB16 U1-AB17 U1-AB18 U1-B4 U1-B5 U1-B6 U1-B10 U1-B12 U1-B13 U1-B17 U1-B18 U1-B19 U1-C1 U1-C2 U1-C4 U1-C6 U1-C10 U1-C12 U1-C13 U1-C18 U1-C21 U1-D1 U1-D2 U1-D6 U1-D10 U1-D13 U1-D17 U1-D18 U1-D21 U1-E1 U1-E2 U1-E3 U1-E4 U1-E5 U1-E6 U1-E7 U1-E8 U1-E10 U1-E11 U1-E13 U1-E14 U1-E16 U1-E17 U1-E18 U1-E19 U1-E20 U1-E21 U1-E22 U1-F10 U1-F11 U1-F18 U1-G1 U1-G2 U1-G21 U1-G22 U1-H1 U1-H2 U1-H3 U1-H4 U1-H5 U1-H19 U1-H20 U1-H21 U1-H22 U1-J6 U1-J17 U1-J18 U1-K1 U1-K2 U1-K3 U1-K4 U1-K21 U1-K22 U1-L2 U1-L3 U1-L4 U1-L5 U1-L17 U1-L18 U1-L19 U1-L20 U1-L21 U1-L22 U1-M1 U1-M2 U1-M3 U1-M4 U1-M5 U1-M6 U1-M17 U1-M18 U1-M19 U1-M20 U1-M21 U1-N1 U1-N2 U1-N17 U1-N21 U1-P5 U1-P6 U1-P17 U1-R1 U1-R2 U1-R3 U1-R4 U1-R18 U1-R19 U1-R20 U1-R21 U1-R22 U1-T1 U1-T2 U1-T21 U1-T22 U1-U3 U1-U4 U1-U10 U1-U11 U1-U12 U1-U13 U1-V3 U1-V4 U1-V5 U1-V6 U1-V7 U1-V9 U1-V10 U1-V12 U1-V13 U1-V19 U1-V20 U1-V21 U1-V22 U1-W1 U1-W2 U1-W6 U1-W10 U1-W13 U1-W17 U1-W21 U1-W22
pad class IO_CLK: U1-AB12 U1-B11 U1-E12 U1-V11
pad class PAR_DATA: U1-AA3 U1-AA4 U1-AB4 U1-AB19 U1-V17 U1-Y4 U1-Y5 U1-Y16 U1-Y18
pad class Fiducials: Free-FID
component class RIOP: C68 C69 C70 C71 C72 C73 C74 C75 C76 C77 C78 C79 C80 C81 C82 C83 C84 C85 C86 C87 C88 C89 C90 C91 C92 C93 C94 L2 L3 L4 L5 L6 L7 L8 L9 P1 P2 P3 P4 P5 P6 P7 P8 R26 R27 TP12 U8
differential pair D_TX1: +TX1P -TX1N
differential pair D_V_TX1: +V_TX1P -V_TX1N
differential pair D_RX1: +RX1P -RX1N
differential pair D_V_RX1: +V_RX1P -V_RX1N
differential pair D_V_RX0: +V_RX0P -V_RX0N
differential pair D_V_TX0: +V_TX0P -V_TX0N
differential pair D_DX: +DXP -DXN
differential pair D_RX0: +RX0P -RX0N
differential pair D_TX0: +TX0P -TX0N

## Components (designator, comment, footprint, x,y, rotation, side; value= is the part's Value field where it differs from the comment)
C1 "10nF" CC1608-0603 21,26 r270 bottom
C2 "10nF" CC1608-0603 41.5,25.5 r0 bottom
C3 "10nF" CC1608-0603 26,26 r270 bottom
C4 "10nF" CC1608-0603 16.5,49.5 r90 bottom
C5 "10nF" CC1608-0603 39.5,54.1 r90 bottom
C6 "10nF" CC1608-0603 32.5,26 r270 bottom
C7 "10nF" CC1608-0603 40,37 r270 bottom
C8 "10nF" CC1608-0603 2.5,6.5 r90 top
C9 "10nF" CC1608-0603 33.5,39 r180 bottom
C10 "10nF" CC1608-0603 29.5,43 r270 bottom
C11 "10nF" CC1608-0603 25.5,41 r0 bottom
C12 "10nF" CC1608-0603 29.5,37 r90 bottom
C13 "10nF" CC1608-0603 45.5,3 r0 top
C14 "10nF" CC1608-0603 25.5,39 r0 bottom
C15 "10nF" CC1608-0603 57.5,27 r0 bottom
C16 "10nF" CC1608-0603 33.5,41 r180 bottom
C17 "10nF" CC1608-0603 20.5,84.5 r90 bottom
C18 "10nF" CC1608-0603 31.5,44 r270 bottom
C19 "10nF" CC1608-0603 27.5,44 r270 bottom
C20 "10nF" CC1608-0603 31.5,36 r90 bottom
C21 "10nF" CC1608-0603 27.5,36 r90 bottom
C22 "10nF" CC1608-0603 48.7,56 r90 top
C23 "10nF" CC1608-0603 36.5,30 r180 bottom
C24 "10nF" CC1608-0603 24.5,34 r180 bottom
C25 "10nF" CC1608-0603 47,45.5 r270 top
C26 "10nF" CC1608-0603 4.5,49.5 r180 bottom
C27 "10nF" CC1608-0603 47.5,28 r180 top
C28 "220nF" CC1608-0603 52.5,3.5 r0 bottom
C29 "220nF" CC1608-0603 14,41.5 r180 bottom
C30 "220nF" CC1608-0603 21,26 r270 top
C31 "220nF" CC1608-0603 37.8,26.5 r180 top
C32 "220nF" CC1608-0603 4,9.5 r0 top
C33 "220nF" CC1608-0603 19,25 r270 top
C34 "220nF" CC1608-0603 14.5,49.5 r90 bottom
C35 "220nF" CC1608-0603 28.5,5 r90 top
C36 "10uF" MCCT-B 11,36 r180 bottom
C37 "10uF" MCCT-B 29,24.5 r270 bottom
C38 "10uF" MCCT-B 42.5,54 r90 bottom
C39 "10uF" MCCT-B 44,39 r0 bottom
C40 "10uF" MCCT-B 44,32 r270 bottom
C41 "10uF" MCCT-B 14,45.5 r180 bottom
C42 "10uF" MCCT-B 16.5,28.5 r270 bottom
C43 "10uF" MCCT-B 40.5,47.5 r90 bottom
C44 "10uF" MCCT-B 45,22.5 r270 top
C45 "10uF" MCCT-B 29,74 r270 bottom
C46 "10uF" MCCT-B 11,31.5 r270 top
C47 "10uF" MCCT-B 8,40 r180 bottom
C48 "10uF" MCCT-B 38,24.5 r270 bottom
C49 "10uF" MCCT-B 57.5,30.5 r0 bottom
C50 "10uF" MCCT-B 17,35.5 r180 bottom
C51 "220uF/4V" MCCT-D 13,26 r180 top
C52 "220uF/4V" MCCT-D 62.5,53.5 r270 top
C53 "220uF/4V" MCCT-D 37.6,17.9 r270 top
C54 "220uF/4V" MCCT-D 11.5,28.5 r270 bottom
C55 "220uF/4V" MCCT-D 54.5,56.3 r0 top
C56 "220uF/4V" MCCT-D 6,45.5 r180 bottom
C57 "220uF/4V" MCCT-D 62.5,23 r180 bottom
C58 "220uF/4V" MCCT-D 18,13.5 r0 top
C59 "10uF" MCCT-B 24,76 r270 bottom
C60 "10uF" MCCT-B 57.5,8 r90 top
C61 "100uF/6V/150mOhm" MCCT-D 54.5,51 r0 top
C62 "22uF/10V/Y5V" CC3225-1210 50,45 r90 top
C63 "22uF/10V/Y5V" CC3225-1210 55.5,46.5 r180 top
C64 "470pF" CC1608-0603 64,36 r90 top
C65 "2.2uF" CC3216-1206 66.5,35.5 r90 top
C66 "10uF/10V/1206/X7R" CC3216-1206 50.5,40.5 r270 bottom
C67 "1uF" CC3216-1206 66.5,41.5 r90 top
C68 "10nF" CC1005-0402 6.95,83 r90 top
C69 "10nF" CC1005-0402 8.25,83 r90 top
C70 "10nF" CC1005-0402 22.35,85 r90 top
C71 "10nF" CC1005-0402 23.65,85 r90 top
C72 "10nF" CC1005-0402 38.35,85.5 r90 top
C73 "10nF" CC1005-0402 39.65,85.5 r90 top
C74 "10nF" CC1005-0402 56.35,84 r90 top
C75 "10nF" CC1005-0402 57.65,84 r90 top
C76 "220nF" CC1608-0603 56.2,14.8 r270 top
C77 "220nF" CC1608-0603 20.5,54 r270 bottom
C78 "220nF" CC1608-0603 23.5,26 r270 top
C79 "220nF" CC1608-0603 35,26 r270 top
C80 "220nF" CC1608-0603 24.5,51.5 r270 bottom
C81 "220nF" CC1608-0603 22.5,51.5 r270 bottom
C82 "220nF" CC1608-0603 26.5,51.5 r270 bottom
C83 "220nF" CC1608-0603 28.5,51.5 r270 bottom
C84 "220nF" CC1608-0603 36.5,51.5 r270 bottom
C85 "220nF" CC1608-0603 34.5,51.5 r270 bottom
C86 "220nF" CC1608-0603 30.5,51.5 r270 bottom
C87 "220nF" CC1608-0603 32.5,51.5 r270 bottom
C88 "10uF" MCCT-B 66,15 r270 top
C89 "10uF" MCCT-B 17.5,54.5 r270 bottom
C90 "10uF" MCCT-B 49.5,65.5 r0 top
C91 "220uF/4V" MCCT-D 7,53.5 r180 bottom
C92 "10uF/10V/1206/X7R" CC3216-1206 49.5,77 r270 bottom
C93 "10uF/10V/1206/X7R" CC3216-1206 59,72 r90 bottom
C94 "10nF NPO" CC3216-1206 59.5,81.5 r0 bottom
HDR1 "54075-1009-HD1" 54075 34.5,63.9 r0 bottom locked
HDR2 "54075-1009-HD2" 54075 34.5,13.1 r0 bottom locked
L1 "SB1806/2R2MS" "IND SB1806" 57,50 r180 bottom
L2 "Inductor" CC1608-0603 22.5,55.5 r90 bottom
L3 "Inductor" CC1608-0603 24.5,55.5 r90 bottom
L4 "Inductor" CC1608-0603 28.5,55.5 r90 bottom
L5 "Inductor" CC1608-0603 26.5,55.5 r90 bottom
L6 "Inductor" CC1608-0603 30.5,55.5 r90 bottom
L7 "Inductor" CC1608-0603 32.5,55.5 r90 bottom
L8 "Inductor" CC1608-0603 36.5,55.5 r90 bottom
L9 "Inductor" CC1608-0603 34.5,55.5 r90 bottom
LED1 "HSMH-C170" "SMD _LED" 49.5,5.5 r180 top locked
LED2 "HSMG-C170" "SMD _LED" 19.5,5.5 r180 top locked
P1 "SMB" SMB_V-RJ45 4.5,90.5 r0 top
P2 "SMB" SMB_V-RJ45 14,87.5 r0 top
P3 "SMB" SMB_V-RJ45 22,93.5 r0 top
P4 "SMB" SMB_V-RJ45 30.5,88.5 r0 top
P5 "SMB" SMB_V-RJ45 39,94 r0 top
P6 "SMB" SMB_V-RJ45 47,88 r0 top
P7 "SMB" SMB_V-RJ45 56,92.5 r0 top
P8 "SMB" SMB_V-RJ45 64.5,87 r0 top
R1 "100R" CC2012-0805 32.5,76 r270 bottom
R2 "100R" CC2012-0805 35,73 r270 bottom
R3 "100R" CC2012-0805 35.5,77 r270 bottom
R4 "100R" CC2012-0805 43.5,72 r270 bottom
R5 "100R" CC2012-0805 45.5,76 r270 bottom
R6 "100R" CC2012-0805 48.5,72 r270 bottom
R7 "100R" CC2012-0805 40.5,72 r90 bottom
R8 "100R" CC2012-0805 38,73 r90 bottom
R9 "100R" CC2012-0805 32,72 r270 bottom
R10 "100R" CC2012-0805 15.5,5.5 r180 top
R11 "470R" CC2012-0805 38,77 r90 bottom
R12 "470R" CC2012-0805 29.45,82 r0 bottom
R13 "470R" CC2012-0805 40.7,76.5 r270 bottom
R14 "470R" CC2012-0805 29,2.1 r0 top
R15 "82R1%" CC2012-0805 55.05,61.5 r180 top
R16 "680R1%" CC2012-0805 55.1,64.1 r0 top
R17 "100k" CC2012-0805 15.5,2.5 r180 top
R18 "1M" CC2012-0805 2.5,3 r90 top
R19 "270R" CC2012-0805 45.5,5.5 r180 top
R20 "270R" CC2012-0805 19.5,2.5 r180 top
R21 "10R" CC2012-0805 53.5,41 r180 top
R22 "82k" CC2012-0805 60,38.5 r180 bottom
R23 "560R1%" CC2012-0805 24,85.5 r180 bottom
R24 "220R1%" CC2012-0805 24.05,83 r180 bottom
R25 "220R1%" CC2012-0805 24,80.5 r0 bottom
R26 "470R" CC2012-0805 50,81.5 r180 bottom
R27 "100k" CC2012-0805 53.5,82.5 r90 bottom
TP1 "(CCLK)" TestPin 40.5,69.5 r90 top
TP2 "(ProgB)" TestPin 40,80 r180 top
TP3 "(TDI)" TestPin 47,79 r90 top
TP4 "(TDO)" TestPin 31.5,79 r180 top
TP5 "(TCK)" TestPin 43.5,76.5 r180 top
TP6 "(TMS)" TestPin 42,79.5 r180 top
TP7 "(5V)" TestPin 53.5,5.5 r90 top
TP8 "(RefClk)" TestPin 15.5,21 r90 top
TP9 "(FpgaClk)" TestPin 15,19 r90 top
TP10 "(1.5V)" TestPin 49,53.5 r90 top
TP11 "(3V)" TestPin 59.5,4 r90 top
TP12 "(2.5VRIO)" TestPin 7.5,29.5 r90 top
TP13 "(3.3V)" TestPin 65.8,19.8 r90 top
TP14 "(2.5V)" TestPin 50,2 r90 top
U1 "XC2VP4-5FG456C" FG456 29.5,40 r180 top
U2 "MAX1617DBR2" QSOP16 9,5 r270 top
U3 "SRAM 512Kx16 TSOP44" SO-G44/P.8 8.8,47 r270 top
U4 "SRAM 512Kx16 TSOP44" SO-G44/P.8 56,28 r270 top
U5 "SN74LVC1G04DBV" SO-G5/P.95 24.5,5.5 r90 top
U6 "MAX1831EEE" QSOP16_150_25 60,41.5 r0 top
U7 "LM1084IS-ADJ" TO-263 18.5,79.04 r270 bottom
U8 "LP2989IM-2.5" SO-8 55.5,77 r270 bottom

## Footprints (in the part's own frame and the unit in brackets; to place one, negate y for a bottom-side part, rotate by r counter-clockwise, add the part's x,y. Pads: shape width x height; smd on the part's side, far side on the other; paste and mask are expansions set on the pad)
54075 [mm] "Connector; Docking Station, Receptacle; 100 Position; Vertical"
  rect 0.5x1.9 smd: 1(-19.6,3.4) 2(-19.6,-3.4) 3(-18.8,3.4) 4(-18.8,-3.4) 5(-18,3.4) 6(-18,-3.4) 7(-17.2,3.4) 8(-17.2,-3.4) 9(-16.4,3.4) 10(-16.4,-3.4) 11(-15.6,3.4) 12(-15.6,-3.4) 13(-14.8,3.4) 14(-14.8,-3.4) 15(-14,3.4) 16(-14,-3.4) 17(-13.2,3.4) 18(-13.2,-3.4) 19(-12.4,3.4) 20(-12.4,-3.4) 21(-11.6,3.4) 22(-11.6,-3.4) 23(-10.8,3.4) 24(-10.8,-3.4) 25(-10,3.4) 26(-10,-3.4) 27(-9.2,3.4) 28(-9.2,-3.4) 29(-8.4,3.4) 30(-8.4,-3.4) 31(-7.6,3.4) 32(-7.6,-3.4) 33(-6.8,3.4) 34(-6.8,-3.4) 35(-6,3.4) 36(-6,-3.4) 37(-5.2,3.4) 38(-5.2,-3.4) 39(-4.4,3.4) 40(-4.4,-3.4) 41(-3.6,3.4) 42(-3.6,-3.4) 43(-2.8,3.4) 44(-2.8,-3.4) 45(-2,3.4) 46(-2,-3.4) 47(-1.2,3.4) 48(-1.2,-3.4) 49(-0.4,3.4) 50(-0.4,-3.4) 51(0.4,3.4) 52(0.4,-3.4) 53(1.2,3.4) 54(1.2,-3.4) 55(2,3.4) 56(2,-3.4) 57(2.8,3.4) 58(2.8,-3.4) 59(3.6,3.4) 60(3.6,-3.4) 61(4.4,3.4) 62(4.4,-3.4) 63(5.2,3.4) 64(5.2,-3.4) 65(6,3.4) 66(6,-3.4) 67(6.8,3.4) 68(6.8,-3.4) 69(7.6,3.4) 70(7.6,-3.4) 71(8.4,3.4) 72(8.4,-3.4) 73(9.2,3.4) 74(9.2,-3.4) 75(10,3.4) 76(10,-3.4) 77(10.8,3.4) 78(10.8,-3.4) 79(11.6,3.4) 80(11.6,-3.4) 81(12.4,3.4) 82(12.4,-3.4) 83(13.2,3.4) 84(13.2,-3.4) 85(14,3.4) 86(14,-3.4) 87(14.8,3.4) 88(14.8,-3.4) 89(15.6,3.4) 90(15.6,-3.4) 91(16.4,3.4) 92(16.4,-3.4) 93(17.2,3.4) 94(17.2,-3.4) 95(18,3.4) 96(18,-3.4) 97(18.8,3.4) 98(18.8,-3.4) 99(19.6,3.4) 100(19.6,-3.4)
  round 0.5 hole 0.7 unplated: MH1(-26.7,4.2) MH2(-25.9,-4.2) MH3(26.7,4.2) MH4(25.9,-4.2)
  round 4.8 hole 5.1 unplated: MH5(-26.3,0) MH6(26.3,0)
  Top Layer keep-out region: -20.15,2.15 20.15,2.15 20.15,-2.15 -20.15,-2.15
  silkscreen extent -30.35,-4.4 30.35,5.02
CC1005-0402 [mm]
  rect 0.9x0.7 smd: 1(-0.65,0) 2(0.65,0)
  silkscreen extent -0.55,-0.6 0.55,0.6
CC1608-0603 [mm]
  rect 1.1x1 smd: 1(-0.85,0) 2(0.85,0)
  silkscreen extent -0.85,-0.75 0.85,0.75
CC2012-0805 [mm]
  rect 1.3x1.5 smd: 1(-0.95,0) 2(0.95,0)
  silkscreen extent -1.1,-1 1.1,1
CC3216-1206 [mm]
  rect 1.6x1.8 smd: 1(-1.4,0) 2(1.4,0)
  silkscreen extent -1.7,-1.15 1.7,1.15
CC3225-1210 [mm]
  rect 1.6x2.7 smd: 1(-1.4,0) 2(1.4,0)
  silkscreen extent -1.7,-1.6 1.7,1.6
FG456 [mm] "456-Ball Fine Pitch Ball Grid Array (FG456)"
  round 0.4 smd mask+0.2: A1(-10.5,10.5) A2(-9.5,10.5) A3(-8.5,10.5) A4(-7.5,10.5) A5(-6.5,10.5) A6(-5.5,10.5) A7(-4.5,10.5) A8(-3.5,10.5) A9(-2.5,10.5) A10(-1.5,10.5) A11(-0.5,10.5) A12(0.5,10.5) A13(1.5,10.5) A14(2.5,10.5) A15(3.5,10.5) A16(4.5,10.5) A17(5.5,10.5) A18(6.5,10.5) A19(7.5,10.5) A20(8.5,10.5) A21(9.5,10.5) A22(10.5,10.5) AA1(-10.5,-9.5) AA2(-9.5,-9.5) AA3(-8.5,-9.5) AA4(-7.5,-9.5) AA5(-6.5,-9.5) AA6(-5.5,-9.5) AA7(-4.5,-9.5) AA8(-3.5,-9.5) AA9(-2.5,-9.5) AA10(-1.5,-9.5) AA11(-0.5,-9.5) AA12(0.5,-9.5) AA13(1.5,-9.5) AA14(2.5,-9.5) AA15(3.5,-9.5) AA16(4.5,-9.5) AA17(5.5,-9.5) AA18(6.5,-9.5) AA19(7.5,-9.5) AA20(8.5,-9.5) AA21(9.5,-9.5) AA22(10.5,-9.5) AB1(-10.5,-10.5) AB2(-9.5,-10.5) AB3(-8.5,-10.5) AB4(-7.5,-10.5) AB5(-6.5,-10.5) AB6(-5.5,-10.5) AB7(-4.5,-10.5) AB8(-3.5,-10.5) AB9(-2.5,-10.5) AB10(-1.5,-10.5) AB11(-0.5,-10.5) AB12(0.5,-10.5) AB13(1.5,-10.5) AB14(2.5,-10.5) AB15(3.5,-10.5) AB16(4.5,-10.5) AB17(5.5,-10.5) AB18(6.5,-10.5) AB19(7.5,-10.5) AB20(8.5,-10.5) AB21(9.5,-10.5) AB22(10.5,-10.5) B1(-10.5,9.5) B2(-9.5,9.5) B3(-8.5,9.5) B4(-7.5,9.5) B5(-6.5,9.5) B6(-5.5,9.5) B7(-4.5,9.5) B8(-3.5,9.5) B9(-2.5,9.5) B10(-1.5,9.5) B11(-0.5,9.5) B12(0.5,9.5) B13(1.5,9.5) B14(2.5,9.5) B15(3.5,9.5) B16(4.5,9.5) B17(5.5,9.5) B18(6.5,9.5) B19(7.5,9.5) B20(8.5,9.5) B21(9.5,9.5) B22(10.5,9.5) C1(-10.5,8.5) C2(-9.5,8.5) C3(-8.5,8.5) C4(-7.5,8.5) C5(-6.5,8.5) C6(-5.5,8.5) C7(-4.5,8.5) C8(-3.5,8.5) C9(-2.5,8.5) C10(-1.5,8.5) C11(-0.5,8.5) C12(0.5,8.5) C13(1.5,8.5) C14(2.5,8.5) C15(3.5,8.5) C16(4.5,8.5) C17(5.5,8.5) C18(6.5,8.5) C19(7.5,8.5) C20(8.5,8.5) C21(9.5,8.5) C22(10.5,8.5) D1(-10.5,7.5) D2(-9.5,7.5) D3(-8.5,7.5) D4(-7.5,7.5) D5(-6.5,7.5) D6(-5.5,7.5) D7(-4.5,7.5) D8(-3.5,7.5) D9(-2.5,7.5) D10(-1.5,7.5) D11(-0.5,7.5) D12(0.5,7.5) D13(1.5,7.5) D14(2.5,7.5) D15(3.5,7.5) D16(4.5,7.5) D17(5.5,7.5) D18(6.5,7.5) D19(7.5,7.5) D20(8.5,7.5) D21(9.5,7.5) D22(10.5,7.5) E1(-10.5,6.5) E2(-9.5,6.5) E3(-8.5,6.5) E4(-7.5,6.5) E5(-6.5,6.5) E6(-5.5,6.5) E7(-4.5,6.5) E8(-3.5,6.5) E9(-2.5,6.5) E10(-1.5,6.5) E11(-0.5,6.5) E12(0.5,6.5) E13(1.5,6.5) E14(2.5,6.5) E15(3.5,6.5) E16(4.5,6.5) E17(5.5,6.5) E18(6.5,6.5) E19(7.5,6.5) E20(8.5,6.5) E21(9.5,6.5) E22(10.5,6.5) F1(-10.5,5.5) F2(-9.5,5.5) F3(-8.5,5.5) F4(-7.5,5.5) F5(-6.5,5.5) F6(-5.5,5.5) F7(-4.5,5.5) F8(-3.5,5.5) F9(-2.5,5.5) F10(-1.5,5.5) F11(-0.5,5.5) F12(0.5,5.5) F13(1.5,5.5) F14(2.5,5.5) F15(3.5,5.5) F16(4.5,5.5) F17(5.5,5.5) F18(6.5,5.5) F19(7.5,5.5) F20(8.5,5.5) F21(9.5,5.5) F22(10.5,5.5) G1(-10.5,4.5) G2(-9.5,4.5) G3(-8.5,4.5) G4(-7.5,4.5) G5(-6.5,4.5) G6(-5.5,4.5) G7(-4.5,4.5) G8(-3.5,4.5) G9(-2.5,4.5) G10(-1.5,4.5) G11(-0.5,4.5) G12(0.5,4.5) G13(1.5,4.5) G14(2.5,4.5) G15(3.5,4.5) G16(4.5,4.5) G17(5.5,4.5) G18(6.5,4.5) G19(7.5,4.5) G20(8.5,4.5) G21(9.5,4.5) G22(10.5,4.5) H1(-10.5,3.5) H2(-9.5,3.5) H3(-8.5,3.5) H4(-7.5,3.5) H5(-6.5,3.5) H6(-5.5,3.5) H7(-4.5,3.5) H16(4.5,3.5) H17(5.5,3.5) H18(6.5,3.5) H19(7.5,3.5) H20(8.5,3.5) H21(9.5,3.5) H22(10.5,3.5) J1(-10.5,2.5) J2(-9.5,2.5) J3(-8.5,2.5) J4(-7.5,2.5) J5(-6.5,2.5) J6(-5.5,2.5) J7(-4.5,2.5) J9(-2.5,2.5) J10(-1.5,2.5) J11(-0.5,2.5) J12(0.5,2.5) J13(1.5,2.5) J14(2.5,2.5) J16(4.5,2.5) J17(5.5,2.5) J18(6.5,2.5) J19(7.5,2.5) J20(8.5,2.5) J21(9.5,2.5) J22(10.5,2.5) K1(-10.5,1.5) K2(-9.5,1.5) K3(-8.5,1.5) K4(-7.5,1.5) K5(-6.5,1.5) K6(-5.5,1.5) K7(-4.5,1.5) K9(-2.5,1.5) K10(-1.5,1.5) K11(-0.5,1.5) K12(0.5,1.5) K13(1.5,1.5) K14(2.5,1.5) K16(4.5,1.5) K17(5.5,1.5) K18(6.5,1.5) K19(7.5,1.5) K20(8.5,1.5) K21(9.5,1.5) K22(10.5,1.5) L1(-10.5,0.5) L2(-9.5,0.5) L3(-8.5,0.5) L4(-7.5,0.5) L5(-6.5,0.5) L6(-5.5,0.5) L7(-4.5,0.5) L9(-2.5,0.5) L10(-1.5,0.5) L11(-0.5,0.5) L12(0.5,0.5) L13(1.5,0.5) L14(2.5,0.5) L16(4.5,0.5) L17(5.5,0.5) L18(6.5,0.5) L19(7.5,0.5) L20(8.5,0.5) L21(9.5,0.5) L22(10.5,0.5) M1(-10.5,-0.5) M2(-9.5,-0.5) M3(-8.5,-0.5) M4(-7.5,-0.5) M5(-6.5,-0.5) M6(-5.5,-0.5) M7(-4.5,-0.5) M9(-2.5,-0.5) M10(-1.5,-0.5) M11(-0.5,-0.5) M12(0.5,-0.5) M13(1.5,-0.5) M14(2.5,-0.5) M16(4.5,-0.5) M17(5.5,-0.5) M18(6.5,-0.5) M19(7.5,-0.5) M20(8.5,-0.5) M21(9.5,-0.5) M22(10.5,-0.5) N1(-10.5,-1.5) N2(-9.5,-1.5) N3(-8.5,-1.5) N4(-7.5,-1.5) N5(-6.5,-1.5) N6(-5.5,-1.5) N7(-4.5,-1.5) N9(-2.5,-1.5) N10(-1.5,-1.5) N11(-0.5,-1.5) N12(0.5,-1.5) N13(1.5,-1.5) N14(2.5,-1.5) N16(4.5,-1.5) N17(5.5,-1.5) N18(6.5,-1.5) N19(7.5,-1.5) N20(8.5,-1.5) N21(9.5,-1.5) N22(10.5,-1.5) P1(-10.5,-2.5) P2(-9.5,-2.5) P3(-8.5,-2.5) P4(-7.5,-2.5) P5(-6.5,-2.5) P6(-5.5,-2.5) P7(-4.5,-2.5) P9(-2.5,-2.5) P10(-1.5,-2.5) P11(-0.5,-2.5) P12(0.5,-2.5) P13(1.5,-2.5) P14(2.5,-2.5) P16(4.5,-2.5) P17(5.5,-2.5) P18(6.5,-2.5) P19(7.5,-2.5) P20(8.5,-2.5) P21(9.5,-2.5) P22(10.5,-2.5) R1(-10.5,-3.5) R2(-9.5,-3.5) R3(-8.5,-3.5) R4(-7.5,-3.5) R5(-6.5,-3.5) R6(-5.5,-3.5) R7(-4.5,-3.5) R16(4.5,-3.5) R17(5.5,-3.5) R18(6.5,-3.5) R19(7.5,-3.5) R20(8.5,-3.5) R21(9.5,-3.5) R22(10.5,-3.5) T1(-10.5,-4.5) T2(-9.5,-4.5) T3(-8.5,-4.5) T4(-7.5,-4.5) T5(-6.5,-4.5) T6(-5.5,-4.5) T7(-4.5,-4.5) T8(-3.5,-4.5) T9(-2.5,-4.5) T10(-1.5,-4.5) T11(-0.5,-4.5) T12(0.5,-4.5) T13(1.5,-4.5) T14(2.5,-4.5) T15(3.5,-4.5) T16(4.5,-4.5) T17(5.5,-4.5) T18(6.5,-4.5) T19(7.5,-4.5) T20(8.5,-4.5) T21(9.5,-4.5) T22(10.5,-4.5) U1(-10.5,-5.5) U2(-9.5,-5.5) U3(-8.5,-5.5) U4(-7.5,-5.5) U5(-6.5,-5.5) U6(-5.5,-5.5) U7(-4.5,-5.5) U8(-3.5,-5.5) U9(-2.5,-5.5) U10(-1.5,-5.5) U11(-0.5,-5.5) U12(0.5,-5.5) U13(1.5,-5.5) U14(2.5,-5.5) U15(3.5,-5.5) U16(4.5,-5.5) U17(5.5,-5.5) U18(6.5,-5.5) U19(7.5,-5.5) U20(8.5,-5.5) U21(9.5,-5.5) U22(10.5,-5.5) V1(-10.5,-6.5) V2(-9.5,-6.5) V3(-8.5,-6.5) V4(-7.5,-6.5) V5(-6.5,-6.5) V6(-5.5,-6.5) V7(-4.5,-6.5) V8(-3.5,-6.5) V9(-2.5,-6.5) V10(-1.5,-6.5) V11(-0.5,-6.5) V12(0.5,-6.5) V13(1.5,-6.5) V14(2.5,-6.5) V15(3.5,-6.5) V16(4.5,-6.5) V17(5.5,-6.5) V18(6.5,-6.5) V19(7.5,-6.5) V20(8.5,-6.5) V21(9.5,-6.5) V22(10.5,-6.5) W1(-10.5,-7.5) W2(-9.5,-7.5) W3(-8.5,-7.5) W4(-7.5,-7.5) W5(-6.5,-7.5) W6(-5.5,-7.5) W7(-4.5,-7.5) W8(-3.5,-7.5) W9(-2.5,-7.5) W10(-1.5,-7.5) W11(-0.5,-7.5) W12(0.5,-7.5) W13(1.5,-7.5) W14(2.5,-7.5) W15(3.5,-7.5) W16(4.5,-7.5) W17(5.5,-7.5) W18(6.5,-7.5) W19(7.5,-7.5) W20(8.5,-7.5) W21(9.5,-7.5) W22(10.5,-7.5) Y1(-10.5,-8.5) Y2(-9.5,-8.5) Y3(-8.5,-8.5) Y4(-7.5,-8.5) Y5(-6.5,-8.5) Y6(-5.5,-8.5) Y7(-4.5,-8.5) Y8(-3.5,-8.5) Y9(-2.5,-8.5) Y10(-1.5,-8.5) Y11(-0.5,-8.5) Y12(0.5,-8.5) Y13(1.5,-8.5) Y14(2.5,-8.5) Y15(3.5,-8.5) Y16(4.5,-8.5) Y17(5.5,-8.5) Y18(6.5,-8.5) Y19(7.5,-8.5) Y20(8.5,-8.5) Y21(9.5,-8.5) Y22(10.5,-8.5)
  silkscreen extent -12.28,-11.5 11.5,11.5
"IND SB1806" [mm] "ABC Electronics"
  rect 5x4 smd: 1(-8,0) 2(8,0)
  silkscreen extent -8.5,-7 8.5,7
MCCT-B [mm]
  rect 2x2.2 smd: 1(-1.5,0) 2(1.5,0)
  silkscreen extent -2.3,-1.6 1.8,1.6
MCCT-D [mm]
  rect 2.6x2.4 smd: 1(-3.2,0) 2(3.2,0)
  silkscreen extent -4.2,-2.4 3.7,2.4
QSOP16 [mm] "SSOP; 16 Leads; Body Width 3.9 mm; Pitch 0.635 mm"
  rect 0.4x2.2 smd: 1(-2.222,-2.6) 2(-1.587,-2.6) 3(-0.952,-2.6) 4(-0.317,-2.6) 5(0.318,-2.6) 6(0.953,-2.6) 7(1.588,-2.6) 8(2.223,-2.6) 9(2.222,2.6) 10(1.587,2.6) 11(0.952,2.6) 12(0.317,2.6) 13(-0.318,2.6) 14(-0.953,2.6) 15(-1.588,2.6) 16(-2.223,2.6)
  silkscreen extent -3.1,-2.72 2.5,1.1
QSOP16_150_25 [mil]
  rect 70x15 smd: 1(-117.5,87.5)
  oval 70x15 smd: 2(-117.5,62.5) 3(-117.5,37.5) 4(-117.5,12.5) 5(-117.5,-12.5) 6(-117.5,-37.5) 7(-117.5,-62.5) 8(-117.5,-87.5) 9(117.5,-87.5) 10(117.5,-62.5) 11(117.5,-37.5) 12(117.5,-12.5) 13(117.5,12.5) 14(117.5,37.5) 15(117.5,62.5) 16(117.5,87.5)
  silkscreen extent -74,-100 74,100
SMB_V-RJ45 [mm] "Connector; SMB Straight"
  round 2.5 hole 1.5: 1(0,0) 2(-2.5,-2.5) 2(-2.5,2.5) 2(2.5,-2.5) 2(2.5,2.5)
  silkscreen extent -3.15,-3.15 3.15,3.15
"SMD _LED" [mm]
  rect 1.3x1.6 smd: 1(0.95,0) 2(-0.95,0)
  silkscreen extent -2.13,-1.15 2,1.15
SO-8 [mm] "Small Outline; 8 Leads; Body Width 3.9 mm; Pitch 1.27 mm"
  rect 0.6x2.2 smd: 1(-1.905,-2.6) 2(-0.635,-2.6) 3(0.635,-2.6) 4(1.905,-2.6) 5(1.905,2.6) 6(0.635,2.6) 7(-0.635,2.6) 8(-1.905,2.6)
  silkscreen extent -2.88,-2.72 2.5,1.1
SO-G5/P.95 [mm]
  rect 0.55x1.45 smd: 1(-0.959,-1.07) 2(-0.009,-1.07) 3(0.941,-1.07) 4(0.941,1.08) 5(-0.959,1.08)
  silkscreen extent -2.43,-2.19 1.64,2.21
SO-G44/P.8 [mm]
  rect 0.45x1.45 smd: 1(-8.4,-5.575) 2(-7.6,-5.575) 3(-6.8,-5.575) 4(-6,-5.575) 5(-5.2,-5.575) 6(-4.4,-5.575) 7(-3.6,-5.575) 8(-2.8,-5.575) 9(-2,-5.575) 10(-1.2,-5.575) 11(-0.4,-5.575) 12(0.4,-5.575) 13(1.2,-5.575) 14(2,-5.575) 15(2.8,-5.575) 16(3.6,-5.575) 17(4.4,-5.575) 18(5.2,-5.575) 19(6,-5.575) 20(6.8,-5.575) 21(7.6,-5.575) 22(8.4,-5.575) 23(8.4,5.575) 24(7.6,5.575) 25(6.8,5.575) 26(6,5.575) 27(5.2,5.575) 28(4.4,5.575) 29(3.6,5.575) 30(2.8,5.575) 31(2,5.575) 32(1.2,5.575) 33(0.4,5.575) 34(-0.4,5.575) 35(-1.2,5.575) 36(-2,5.575) 37(-2.8,5.575) 38(-3.6,5.575) 39(-4.4,5.575) 40(-5.2,5.575) 41(-6,5.575) 42(-6.8,5.575) 43(-7.6,5.575) 44(-8.4,5.575)
  silkscreen extent -9.3,-5.7 9.25,4.45
TestPin [mil] "SingleTest Pin"
  round 60 hole 35.43: 1(0,0)
TO-263 [mm]
  rect 1x4.5 smd: 1(0,0) 2(2.54,0) 3(5.08,0)
  rect 10.25x8.9 smd: 4(2.54,10.45)
  silkscreen extent -3.1,-3.13 8.2,15

## Part data
C1 C2 C3 C4 C5 C6 C7 C8 C9 C10 C11 C12 C13 C14 C15 C16 C17 C18 C19 C20 C21 C22 C23 C24 C25 C26 C27 C28 C29 C30 C31 C32 C33 C34 C35 C62 C63 C64 C65 C66 C67 C68 C69 C70 C71 C72 C73 C74 C75 C76 C77 C78 C79 C80 C81 C82 C83 C84 C85 C86 C87 C92 C93 C94: library part CAP, "Capacitor"
C36 C37 C38 C39 C40 C41 C42 C43 C44 C45 C46 C47 C48 C49 C50 C51 C52 C53 C54 C55 C56 C57 C58 C59 C60 C61 C88 C89 C90 C91: library part CAP_POLAR, "Polar Capacitor"
HDR1 HDR2: "Board-to-Board, Docking Station, 0.80mm (.031\") Pitch, Shielded Receptacle, Vertical, Ultra Low Profile, SMT"
L1: library part "Inductor Iron Dot", "Magnetic-Core Inductor with Winding Polarity Marking"
LED1: library part HSMX-C670, "Typical RED GaAs SMD LED Agilent make"
LED2: library part HSMX-C670, "Typical GREEN GaAs SMD LED Agilent make"
P1 P2 P3 P4 P5 P6 P7 P8: "SMB Straight Connector"
R1 R2 R3 R4 R5 R6 R7 R8 R9 R10 R11 R12 R13 R14 R15 R16 R17 R18 R19 R20 R21 R22 R23 R24 R25 R26 R27: library part RES, "Resistor"
TP1 TP2 TP3 TP4 TP5 TP6 TP7 TP8 TP9 TP10 TP11 TP12 TP13 TP14: library part TestPin
U1: "Virtex-II Pro Platform FPGA, 456-Ball FBGA, Speed Grade 5, 248 User I/Os, Commercial Grade"
U2: "SMBus Temperature Sensor with Internal and External Diode Input"
U3 U4: "512Kx16Bit SRAM TSOP44"
U5: library part SN74AHC1G04DBVR
U6: "3A,!MHz, Low Voltage, Step-Down Regulator with Synchronous Rectification and Internal Switches"
U7: "5A Low Dropout Positive Regulators"
U8: library part LP2989, "NS Micropower/Low Noise 500mA LDO"

## Free pads (board coordinates)
  round 1 smd mask+2: FID(4.3,21.3) FID(22.1,64.5) FID(50.7,12.6)
  round 1 smd far side mask+2: FID(8.9,20.8) FID(39.2,85.6) FID(56.1,35.1)
  round 3.2 hole 3.5 unplated: LP(4,34) LP(65,4) LP(65,73)

## Via types
v1: diameter 0.6, hole 0.3, Top Layer to Bottom Layer, tented bottom, 695 vias
v2: diameter 0.9, hole 0.5, Top Layer to Bottom Layer, tented bottom, 45 vias
v3: diameter 1.8, hole 1, Top Layer to Bottom Layer, tented bottom, 26 vias
v4: diameter 1, hole 0.7, Top Layer to Bottom Layer, tented bottom, 17 vias
v5: diameter 1, hole 0.5, Top Layer to Bottom Layer, tented bottom, 15 vias
v6: diameter 1.5, hole 1, Top Layer to Bottom Layer, tented bottom, 4 vias
v7: diameter 0.8, hole 0.4, Top Layer to Bottom Layer, tented bottom, 3 vias
v8: diameter 0.9, hole 0.5, Top Layer to Bottom Layer, 2 vias

## Nets (pads, with @x,y where several pads share a name; then routed paths per layer and width w, separated by ;. In a path a pad name is that pad's centre, name@x,y a point inside that pad or via, vN(x,y) a via of type N, cw(c..) or ccw(c..) an arc to the next point about the centre after c; other vN are vias at no path point)
5V: C59.1 C63.2 C66.2 HDR1.97 HDR1.99 HDR2.97 HDR2.99 R21.2 TP7.1 U6.2 U6.4 U7.3 | length 203.7
  Top Layer w0.38: R21.2@52.55,41 52.55,41.75 v5@53.6,42.8 ; 54.412,43.088 55,43.088 55.1,43.088 U6.2@57.015,43.088 ; 55.2,42.4 55.782,41.818 U6.4@57.015,41.818
  Top Layer w0.4: v1(51.2,40.5) 52.05,40.5 R21.2@52.55,41
  Top Layer w1.5: 54.1,58.3 54.1,54.9 55,54 55,46.5 55,44.1 55,43.088 v5@55,42.9
  MidLayer1 w1.5: v5(26.5,78.7) v5(27.6,78.7) v5(28.7,78.7) 29.5,79.5 29.5,80.5 31.2,82.2 43.7,82.2 44.4,81.5 48,81.5 51.8,77.7 51.8,70.5 52.1,70.1 52.1,65.2 54.1,63.2 v2(54.1,58.9) 54.1,58.4 53.9,58.2 54.1,58.2 54.3,58.2 54.4,58.1 55.2,57.3 55.2,48 54.3,47.1 54.3,44.1 54.3,43.8 54.4,43.7 54.4,42.9 54.4,38.3 56,36.7 56,30.3 58.1,28.2 58.1,22 55.9,19.8 55.9,8.1 53.5,5.7 TP7.1@53.5,5.5
  Bottom Layer w0.4: C66.2@50.5,39.1 C66.2@50.5,39.2 ; v1(51.2,40.5) 52.6,40.5 ; HDR2.97@53.3,9.7 53.3,5.7 TP7.1@53.5,5.5 ; 54.2,7.7 HDR2.99@54.2,9.7
  Bottom Layer w0.5: 53.3,59.1 HDR1.97@53.3,60.5 ; v2@54.1,59.1 HDR1.99@54.1,60.5
  Bottom Layer w1: U7.3@18.5,73.96 20.9,74 21.8,74.9 21.8,76.5 22.8,77.5 C59.1@24,77.5 ; C59.1@24.1,77.5 24.9,77.5 26.1,78.7 v5(26.5,78.7) v5(27.6,78.7) v5(28.7,78.7) v5@28.8,78.7 ; C66.2@50.5,39.2 52.5,39.2 ; TP7.1@53.5,5.5 53.5,7.7 54.2,7.7 55.1,7.7 56,8.6 56,20.7 53.6,23.1 53.6,26.9 53,27.5 53,31.1 52.1,32 52.1,37.5 52.6,38 52.6,40.5 52.6,41.2 ; v5@54,42.6 52.6,41.2 ; v5@55.3,44.1 v5(55.1,44.1) v5(53.9,44.1) 53.1,44.1 52.6,43.6 52.6,41.2
  other v2: 53.6,58.3 54.6,58.3
  other v5: 53.9,42.9 55.1,42.9
AUDIO_SPI_CSN: HDR1.11 U1.AB21 | length 10.5
  Top Layer w0.2: v1(18.9,58.3) 18.9,57.7 20,56.6 U1.AB21@20,50.5
  Bottom Layer w0.2: v1(18.9,58.3) HDR1.11@18.9,60.5
BLUE0: HDR1.14 U1.L18 | length 59
  Top Layer w0.2: v1(22.5,40) U1.L18@23,39.5
  MidLayer2 w0.127: 20,40.5 22,40.5
  MidLayer2 w0.2: 20,40.5 15.8,44.7 12.1,44.7 11.6,44.2 10.5,44.2 9.4,45.3 9.4,57.7 13.5,61.8 13.5,66.4 11.1,68.8 11.1,71.2 12.1,72.2 18.9,72.2 v1(20.3,70.8) ; 22,40.5 v1(22.5,40)
  Bottom Layer w0.2: HDR1.14@19.7,67.3 19.7,70 19.7,70.2 v1(20.3,70.8)
BLUE1: HDR1.16 U1.M21 | length 53.1
  Top Layer w0.2: v1(16.7,39.9) 17.3,39.9 17.5,40.1 18.5,40.1 18.6,40 19.5,40 U1.M21@20,40.5
  MidLayer1 w0.2: v1(12.2,70.2) 12.2,61.4 8.4,57.6 8.4,42.5 10.8,40.1 15.6,40.1 15.8,39.9 v1(16.7,39.9)
  MidLayer2 w0.2: v1(12.2,70.2) 12.6,70.6 18.5,70.6 20.1,69 v1(20.5,69)
  Bottom Layer w0.2: HDR1.16@20.5,67.3 v1(20.5,69)
BOC_CTS: HDR1.13 U1.V20 | length 16.3
  Top Layer w0.2: v1(20.5,47) U1.V20@21,46.5
  MidLayer1 w0.2: v1(19.3,56.4) 19.3,54.7 19.9,54.1 19.9,51.4 19.637,51.137 19.637,51.102 18.9,50.366 18.9,47.5 19.4,47 v1(20.5,47)
  Bottom Layer w0.2: v1(19.3,56.4) 19.3,57.7 19.7,58.1 HDR1.13@19.7,60.5
BOC_RTS: HDR1.17 U1.M20 | length 40.6
  Top Layer w0.2: v1(20.5,41) U1.M20@21,40.5
  MidLayer1 w0.2: v1(11.3,56.5) 10,55.2 10,44.4 12.4,42 14.5,42 15,42.5 18.1,42.5 19.6,41 v1(20.5,41)
  MidLayer2 w0.2: v1(11.3,56.5) 14.9,56.5 16,55.4 20.2,55.4 v1(21.3,56.5)
  Bottom Layer w0.2: v1(21.3,56.5) HDR1.17@21.3,60.5
BOC_RX: HDR1.19 U1.L17 | length 22.3
  Top Layer w0.2: v1(23.5,40) U1.L17@24,39.5
  MidLayer1 w0.127: 23,45.5 23,48.5 ; 24,40.5 24,43.5
  MidLayer1 w0.2: v1(22.3,59) 22.3,56.4 23.1,55.6 23.1,48.6 23,48.5 ; 23,45.5 23.2,45.3 23.2,44.3 24,43.5 ; v1(23.5,40) 24,40.5
  Bottom Layer w0.2: HDR1.19@22.1,60.5 22.1,59.2 v1(22.3,59)
BOC_TX: HDR1.15 U1.Y21 | length 12.6
  Top Layer w0.2: U1.Y21@20,48.5 20.5,49 20.5,57 v1(20,57.5)
  Bottom Layer w0.2: v1(20,57.5) 20.5,58 HDR1.15@20.5,60.5
BUZZER: HDR2.24 U1.E17 | length 17.6
  Top Layer w0.2: v1(23.5,33) U1.E17@24,33.5
  MidLayer3 w0.127: 24,30.5 24,32.5
  MidLayer3 w0.2: v1(23.5,33) 24,32.5 ; v1(23.7,19.5) 24.1,19.9 24.1,24.5 24,24.6 24,30.5
  Bottom Layer w0.2: HDR2.24@23.7,16.5 v1(23.7,19.5)
CAN_RXD: HDR1.4 U1.W22 | length 26.7
  Top Layer w0.2: v1(16.4,57.7) 16.4,57.1 18.3,55.2 18.3,53.1 16.8,51.6 16.8,50.6 16.4,50.2 16.4,49.1 18,47.5 U1.W22@19,47.5
  MidLayer1 w0.2: v1(15.7,69) 15.7,67.2 15.9,67 15.9,58.2 v1(16.4,57.7)
  Bottom Layer w0.2: HDR1.4@15.7,67.3 v1(15.7,69)
CAN_TXD: HDR1.2 U1.V22 | length 30.2
  Top Layer w0.2: v1(13.9,57.5) 16.5,54.9 16.5,52.5 16,52 16,50.966 15.6,50.566 15.6,48.7 17.8,46.5 U1.V22@19,46.5
  MidLayer1 w0.2: v1(13.9,57.5) 13.9,68 14.9,69 v1(14.9,70)
  Bottom Layer w0.2: HDR1.2@14.9,67.3 v1(14.9,70)
DXN: C8.1 R18.2 U1.C5 U2.4 | length 72.4
  Top Layer w0.2: v1(35.5,31) U1.C5@36,31.5
  Top Layer w0.3: R18.2@2.5,3.95 C8.1@2.5,5.65 ; 2.5,4.8 v1(4.7,4.8) 5.218,5.318 U2.4@6.4,5.318
  MidLayer1 w0.2: v1(4.7,4.8) 4.7,4.566 7.666,1.6 37.7,1.6 37.9,1.8 37.9,6.2 37.5,6.6 37.5,7.3 37.9,7.7 37.9,13.7 34.9,16.7 34.9,23.2 35.6,23.9 35.6,24.6 35.5,24.7 v1(35.5,31)
DXP: C8.2 U1.C4 U2.3 | length 75.2
  Top Layer w0.2: v1(36.5,31) U1.C4@37,31.5
  Top Layer w0.3: C8.2@2.5,7.35 3.35,7.35 4.747,5.953 U2.3@6.4,5.953
  MidLayer1 w0.2: v1(3.9,6.8) 3.9,4.8 7.5,1.2 38,1.2 38.3,1.5 38.3,6.2 38.7,6.6 38.7,7.3 38.3,7.7 38.3,13.866 36.893,15.293 ; 36,16.166 35.3,16.866 35.3,20.7 36.4,21.8 36.4,24.8 35.9,25.3 35.9,30.3 36.5,30.9 v1(36.5,31) ; 36.017,16.183 36.9,15.3
FPGA_AUX0: R6.1 U1.A2 | length 61.4
  Top Layer w0.2: U1.A2@39,29.5 40.6,27.9 v1(41.2,27.9)
  MidLayer3 w0.2: v1(47,25.6) 47,31.7 46.1,32.6 46.1,39.8 47.8,41.5 47.8,50.5 50.1,52.8 50.1,56.5 51.2,57.6 51.2,61.8 51.5,62.1 51.5,69.6 v1(50.1,71)
  Bottom Layer w0.2: v1(41.2,27.9) 42.266,27.9 44.566,25.6 v1(47,25.6) ; R6.1@48.5,72.95 49.45,72.95 50.1,72.3 v1(50.1,71)
FPGA_AUX1: HDR1.88 U1.Y1 | length 26.6
  Top Layer w0.2: U1.Y1@40,48.5 40.5,48.5 46.9,54.9 v1(46.9,56.7)
  MidLayer1 w0.2: v1(46.9,56.7) 47.5,57.3 47.5,58 46.9,58.6 46.9,62.5 49.3,64.9 v1(49.3,68.9)
  Bottom Layer w0.2: HDR1.88@49.3,67.3 v1(49.3,68.9)
FPGA_AUX2: HDR1.90 U1.N2 | length 40.1
  Top Layer w0.2: U1.N2@39,41.5 39.5,41 40.368,41 40.468,41.1 42.2,41.1 42.5,40.8 v1(43.7,40.8)
  MidLayer3 w0.2: v1(43.7,40.8) 47,44.1 47,54 47.5,54.5 47.5,58.2 47.1,58.6 47.1,60.3 50.1,63.3 v1(50.1,70)
  Bottom Layer w0.2: HDR1.90@50.1,67.2 HDR1.90@50.1,67.3 v1(50.1,70)
FPGA_AUX3: HDR1.92 U1.M2 | length 38.7
  Top Layer w0.2: U1.M2@39,40.5 39.5,40 40.368,40 40.468,39.9 v1(44,39.9)
  MidLayer3 w0.2: v1(44,39.9) 47.4,43.3 47.4,53.7 47.9,54.2 47.9,58.2 48.3,58.6 48.3,60 50.9,62.6 v1(50.9,68.9)
  Bottom Layer w0.2: HDR1.92@50.9,67.3 v1(50.9,68.9)
FPGA_CCLK: R7.2 U1.W20 | length 45.6
  Top Layer w0.2: U1.W20@21,47.5 v1(21.5,48)
  MidLayer2 w0.2: v1(23.4,73) 23.8,73 24,73.2 25.1,73.2 25.3,73 39.3,73 v1(40.5,74.2)
  MidLayer3 w0.2: v1(21.5,48) 21.5,54.4 22.9,55.8 22.9,69 23.4,69.5 23.4,69.833 23.5,69.933 23.5,70.8 23.4,70.9 v1(23.4,73)
  Bottom Layer w0.2: R7.2@40.5,72.95 v1(40.5,74.2)
FPGA_CCLK_R: HDR1.66 R7.1 TP1.1 | length 3.8
  Bottom Layer w0.2: HDR1.66@40.5,67.3 TP1.1@40.5,69.5 R7.1@40.5,71.05
FPGA_CLK: HDR2.2 TP9.1 U1.D11 | length 30.1
  Top Layer w0.2: v1(29.5,32) U1.D11@30,32.5
  MidLayer2 w0.127: 29,30.5 29,31.5
  MidLayer2 w0.2: v1(28.7,24.5) 28.7,26.5 28.4,26.8 28.4,28.6 29,29.2 29,30.5 ; 29,31.5 v1(29.5,32)
  Bottom Layer w0.2: HDR2.2@14.9,16.5 14.9,18.9 TP9.1@15,19 14.2,19.8 14.2,21.9 14.8,22.5 19.6,22.5 19.8,22.7 24.3,22.7 25.1,23.5 26.8,23.5 27.8,24.5 v1(28.7,24.5)
FPGA_CLK_1: HDR1.30 U1.Y12 | length 26.1
  Top Layer w0.2: v1(28.5,49) U1.Y12@29,48.5
  MidLayer1 w0.2: v1(25.4,70) 27.1,68.3 27.1,58.034 27.8,57.334 27.8,52 28.5,51.3 v1(28.5,49)
  Bottom Layer w0.2: v1(25.4,70) 26.1,69.3 HDR1.30@26.1,67.3 HDR1.30@26.1,67.2
FPGA_CLK_2: HDR1.32 U1.U11 | length 34.2
  Top Layer w0.2: v1(29.5,46) U1.U11@30,45.5
  MidLayer1 w0.127: 30,46.5 30,48.5
  MidLayer1 w0.2: v1(25.3,71.6) 26.6,71.6 27.9,70.3 27.9,58.4 28.6,57.7 28.6,55.4 29.6,54.4 29.6,50.1 29.9,49.8 29.9,48.6 30,48.5 ; v1(29.5,46) 30,46.5
  Bottom Layer w0.2: v1(25.3,71.6) 26.9,70 HDR1.32@26.9,67.3
FPGA_DIN: HDR1.64 U1.V17 | length 46
  Top Layer w0.2: v1(23.5,46) U1.V17@24,46.5
  MidLayer2 w0.2: v1(24.1,70.8) 24.5,70.8 24.7,70.6 29.5,70.6 29.8,70.3 32.1,70.3 32.5,70.7 36.2,70.7 36.8,70.1 v1(39.3,70.1)
  MidLayer3 w0.127: 23,46.5 23,48.5
  MidLayer3 w0.2: 23,46.5 v1(23.5,46) ; 23,48.5 24,49.5 24,51.3 24.9,52.2 24.9,57.8 24.3,58.4 24.3,68.2 24.4,68.3 24.4,69.3 23.9,69.8 23.9,70.2 24.1,70.4 v1(24.1,70.8) ; v1@23.9,70.8 v1@24,70.9
  Bottom Layer w0.2: v1(39.3,70.1) 39.3,68.8 39.7,68.4 HDR1.64@39.7,67.3
FPGA_DONE: R4.1 R14.1 U1.Y18 U5.2 | length 161.1
  Top Layer w0.2: v1(21,7) 21.4,7.4 24.1,7.4 24.5,7 24.5,5.6 24.609,5.491 U5.2@25.57,5.491 ; U1.Y18@23,48.5 v1(23.5,48) ; 26.9,2.8 26.9,2.4 27.2,2.1 R14.1@28.05,2.1
  Top Layer w0.3: U5.2@25.57,5.491 26.609,5.491 26.9,5.2 26.9,2.8
  MidLayer1 w0.2: v1(22,73.4) 22,70 22.424,69.576 23.1,68.9 23.1,56.3 23.5,55.9 v1(23.5,48)
  MidLayer2 w0.2: v1(21,7) 20.5,7.5 20.5,18.3 19.6,19.2 19.6,24.7 17.5,26.8 7.922,36.378 7.3,37 7.3,58.066 11.8,62.566 11.8,65.6 9.5,67.9 9.5,72.1 11.2,73.8 20.5,73.8 20.9,73.4 v1(22,73.4) 24.648,76.048 24.648,78.048 26.8,80.2 30.1,80.2 30.5,80.6 38,80.6 38.9,81.5 42.3,81.5 43.4,80.4 43.4,78.5 42,77.1 42,76 v1(43.5,74.5)
  Bottom Layer w0.2: R4.1@43,72.95 R4.1@43.5,72.95 v1(43.5,74.5)
FPGA_INIT: HDR1.68 R13.2 U1.W17 | length 55.5
  Top Layer w0.2: U1.W17@24,47.5 v1(24.5,47)
  MidLayer2 w0.2: v1(26.1,76.7) v1(39.4,76.7)
  MidLayer3 w0.127: 25,47.5 25,50.5
  MidLayer3 w0.2: v1(24.5,47) 25,47.5 ; 25,50.5 25.356,50.856 25.356,57.344 25.356,58.044 24.7,58.7 24.7,60.6 26.1,62 26.1,70.5 25.9,70.7 25.9,75.657 26.1,75.857 v1(26.1,76.7)
  Bottom Layer w0.2: R13.2@40.5,75.05 41.6,73.95 41.6,68.9 41.3,68.6 HDR1.68@41.3,67.3
  Bottom Layer w0.3: v1(39.4,76.7) 39.4,76.2 40.05,75.55 R13.2@40.7,75.55
FPGA_M0: R3.1 U1.Y4 | length 37.8
  Top Layer w0.2: v1(36.5,49) U1.Y4@37,48.5
  MidLayer3 w0.2: v1(34.1,79.5) 33.4,78.8 33.4,75.3 36.7,72 36.7,60.8 33.8,57.9 33.8,56.5 35.158,55.142 35.158,51.842 36.5,50.5 v1(36.5,49)
  Bottom Layer w0.2: v1(34.1,79.5) 34.9,79.5 35.5,78.9 R3.1@35.5,77.95
FPGA_M1: R2.1 U1.W3 | length 33.3
  Top Layer w0.2: U1.W3@38,47.5 v1(38.5,48)
  MidLayer3 w0.2: v1(34,75.8) 37.1,72.7 37.1,58.334 36.7,57.934 36.7,57.366 37.266,56.8 37.3,56.8 38.3,55.8 38.3,50.5 38.8,50 38.8,48.3 v1(38.5,48) v1@38.5,47.9
  Bottom Layer w0.2: v1(34,75.8) 34,74.95 R2.1@35,73.95
FPGA_M2: R1.1 U1.Y5 | length 34.8
  Top Layer w0.2: v1(35.5,49) U1.Y5@36,48.5
  MidLayer3 w0.2: v1(32.5,78.2) 32.5,75.634 36.3,71.834 36.3,61.1 33.4,58.2 33.4,56.334 33.9,55.834 33.9,51.7 35.5,50.1 v1(35.5,49)
  Bottom Layer w0.2: R1.1@32.5,76.95 v1(32.5,78.2)
FPGA_PROGRAM: R8.2 TP2.1 U1.B1 | length 71.7
  Top Layer w0.2: v1(39.5,30) U1.B1@40,30.5
  MidLayer3 w0.2: TP2.1@40,80 40,79.4 41.7,77.7 41.7,59.433 42.4,58.733 42.4,58.3 42.7,58 42.7,47.7 42.1,47.1 42.1,40.2 44,38.3 44,28.3 v1(44.8,27.5)
  Bottom Layer w0.2: R8.2@38,73.95 36.6,75.35 36.6,78.7 37.9,80 TP2.1@40,80 ; v1(39.5,30) 40,30.5 41,30.5 44,27.5 v1(44.8,27.5)
FPGA_PROGRAM_R: HDR1.62 R8.1 R11.1 | length 10.7
  Bottom Layer w0.2: R8.1@38,72.05 39.1,72.05 ; R11.1@38,76.05 38.15,76.05 39.1,75.1 39.1,71 38.6,70.5 38.6,69.5 38.9,69.2 HDR1.62@38.9,67.3
FPGA_TCK: HDR1.72 TP5.1 U1.B22 | length 100.3
  Top Layer w0.2: v1(18.5,30) U1.B22@19,30.5
  MidLayer2 w0.2: v1(18.5,30) 15.5,30 9.5,36 9.5,40.234 8.2,41.534 8.2,57.8 8.925,58.525 12.7,62.3 12.7,65.934 10.3,68.334 10.3,71.7 11.6,73 19.5,73 20.6,71.9 24.6,71.9 25.2,72.5 42.7,72.5 44.3,74.1 44.3,75.7 TP5.1@43.5,76.5
  Bottom Layer w0.2: HDR1.72@42.9,67.3 42.9,68.7 42.4,69.2 42.4,74.4 43.5,75.5 TP5.1@43.5,76.5 TP5.1@43,76.5
FPGA_TDI: HDR1.78 TP3.1 U1.D3 | length 74
  Top Layer w0.2: U1.D3@38,32.5 v1(38.5,32)
  MidLayer1 w0.2: v1(38.5,32) 40,32 43.1,28.9 v1(44.7,28.9)
  MidLayer3 w0.2: v1(44.7,28.9) 44.7,30.5 44.4,30.8 44.4,38.5 42.5,40.4 42.5,45.4 43.7,46.6 44.8,47.7 44.8,50.5 45.9,51.6 45.9,58.1 45.3,58.7 45.3,77.3 TP3.1@47,79
  Bottom Layer w0.2: HDR1.78@45.3,67.3 45.3,72.4 45.8,72.9 46.2,73.3 46.7,73.8 46.7,77.8 47,78.1 TP3.1@47,79
FPGA_TDO: R9.2 R12.2 U1.D20 | length 85.5
  Top Layer w0.2: v1(20.5,32) U1.D20@21,32.5
  MidLayer2 w0.2: v1(20.5,32) 19.6,32.9 15.8,32.9 15.5,33.2 12.9,33.2 9.9,36.2 9.9,40.4 8.6,41.7 8.6,57.6 13.1,62.1 13.1,66.1 10.7,68.5 10.7,71.5 11.8,72.6 19.2,72.6 20.4,71.4 24.466,71.4 24.866,71 27.8,71 28.6,71.8 v1(30.7,71.8)
  Bottom Layer w0.2: R12.2@30.4,82 30.4,80.4 29.977,79.977 29.977,77.423 30.8,76.6 30.8,73 30.7,72.9 v1(30.7,71.8) 31.5,71.5 R9.2@32,71.05
FPGA_TDO_R: HDR1.54 R9.1 TP4.1 | length 16.4
  Bottom Layer w0.2: TP4.1@30.8,78.9 TP4.1@30.9,78.9 ; TP4.1@31.5,79 31.3,78.8 31.3,74.1 31.4,74 32,74 ; R9.1@32,72.95 32,74 ; HDR1.54@35.7,67.3 35.7,69.834 35.134,70.4 33.7,70.4 33.3,70.8 33.3,73.5 32.8,74 32,74
FPGA_TMS: HDR1.70 TP6.1 U1.A21 | length 103.3
  Top Layer w0.2: v1(19.4,28.8) 19.4,28.9 U1.A21@20,29.5
  MidLayer2 w0.2: v1(19.4,28.8) 18.7,28.1 16.8,28.1 9.1,35.8 9.1,40.069 7.8,41.369 7.8,58 8.4,58.6 12.3,62.5 12.3,65.769 9.9,68.169 9.9,71.9 11.4,73.4 19.8,73.4 20.7,72.5 21.9,72.5 25.2,75.8 25.2,76.9 25.8,77.5 27.7,77.5 27.9,77.3 38.7,77.3 38.9,77.5 40,77.5 TP6.1@42,79.5
  Bottom Layer w0.2: TP6.1@42,79.5 42,68.7 42.1,68.6 HDR1.70@42.1,67.3